# EAGLE board Main Board - Single-Panel (EAGLE 9.6.2), part 1 of 3
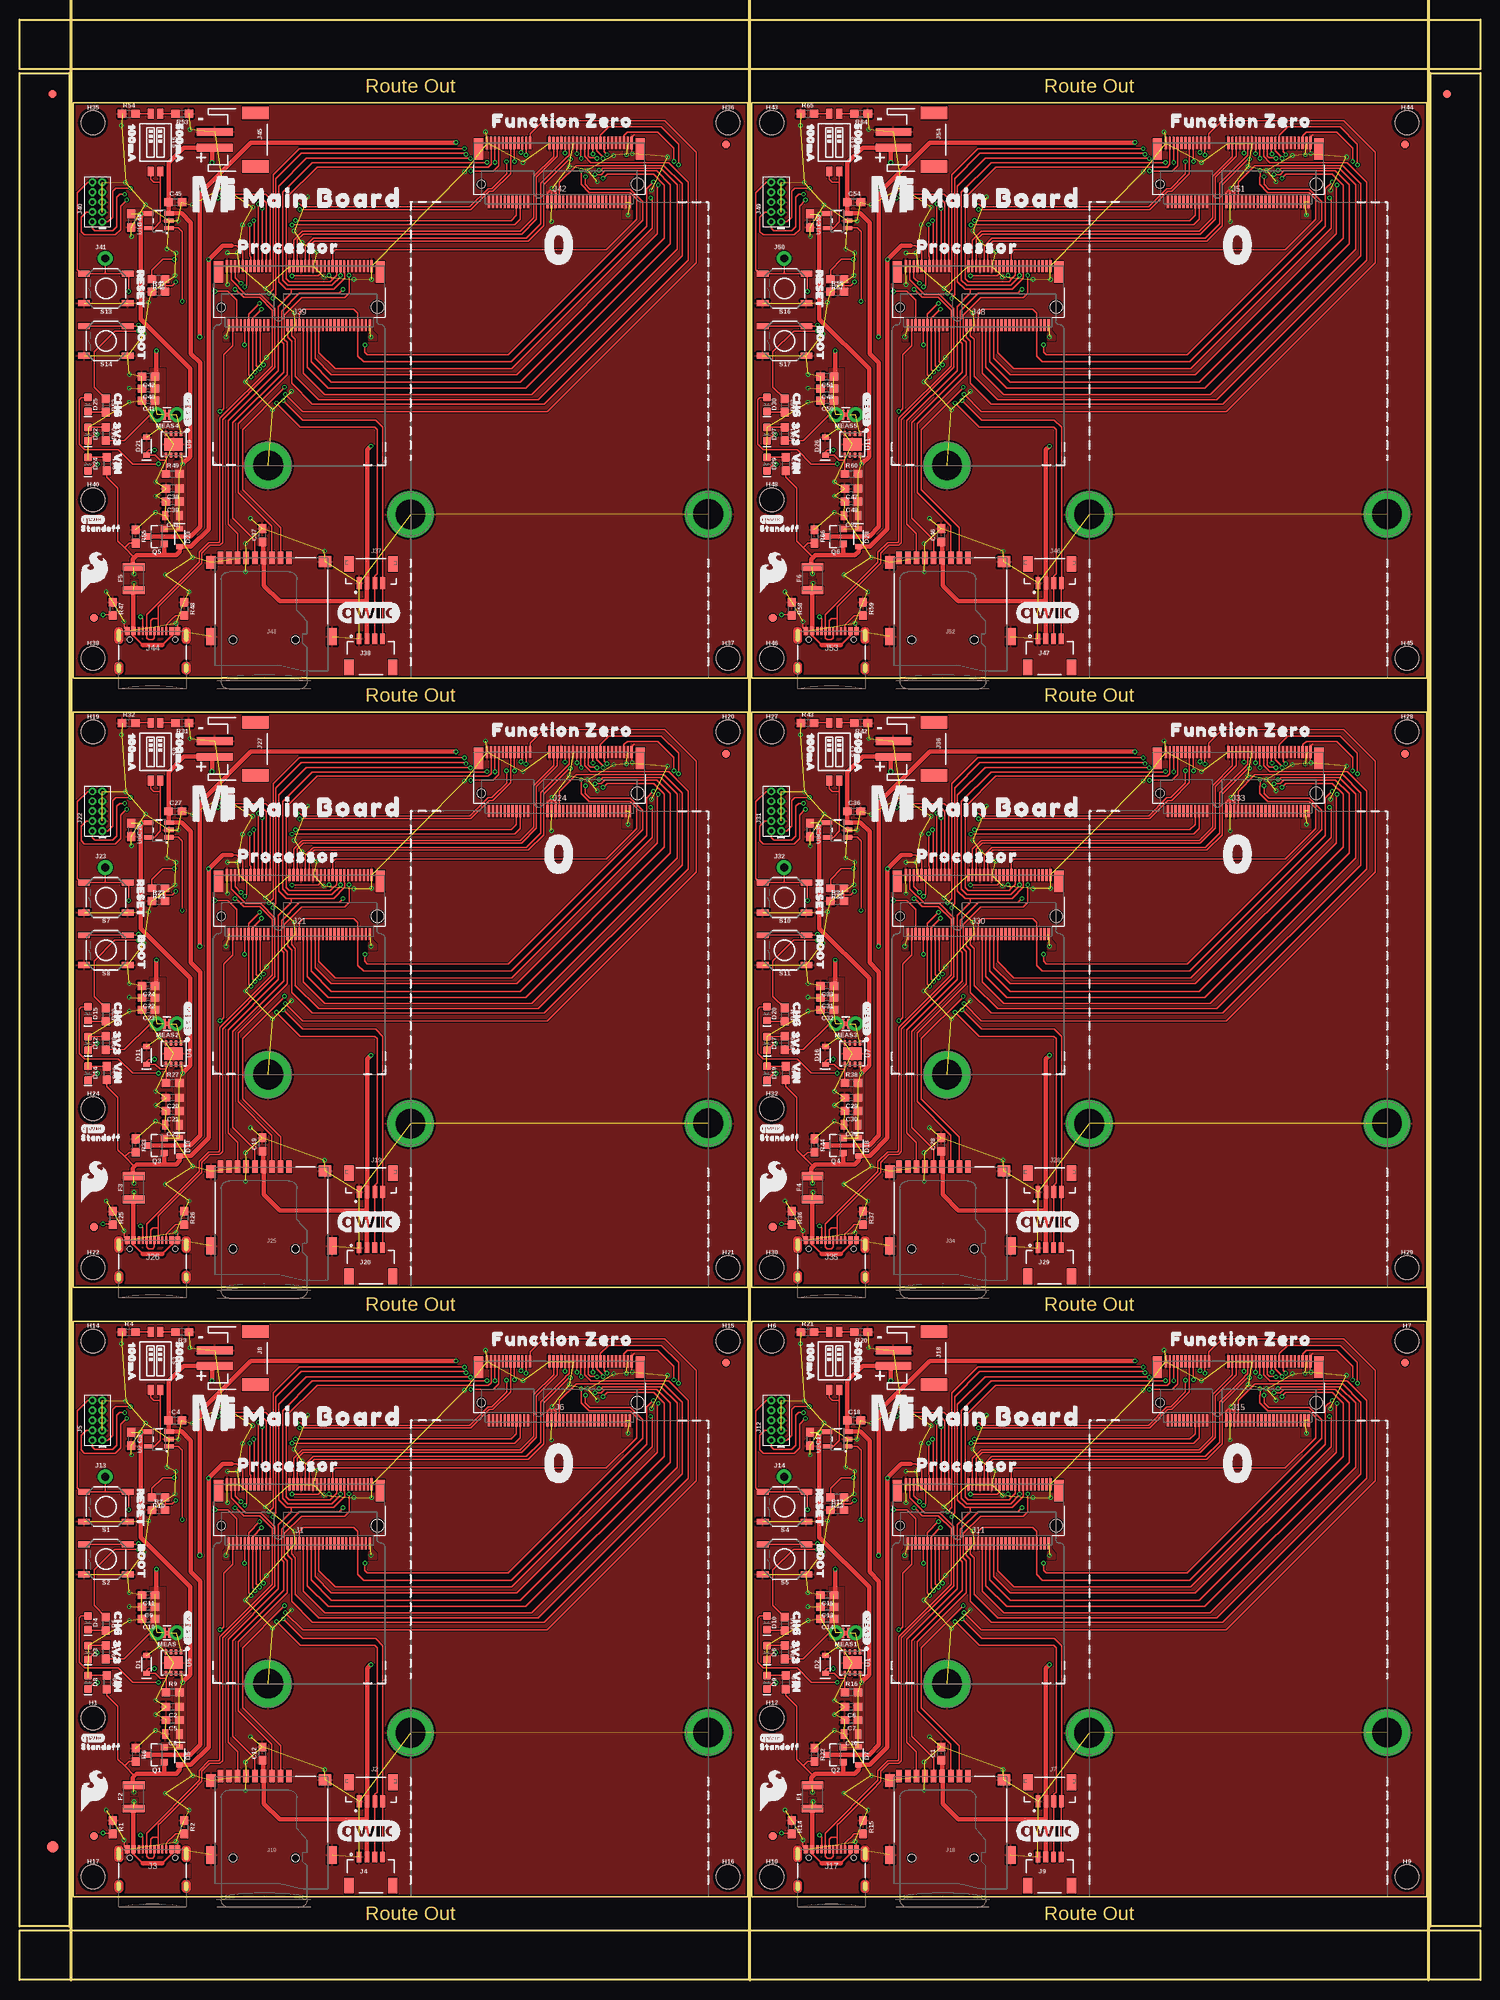
[diagram p0: board, top side]
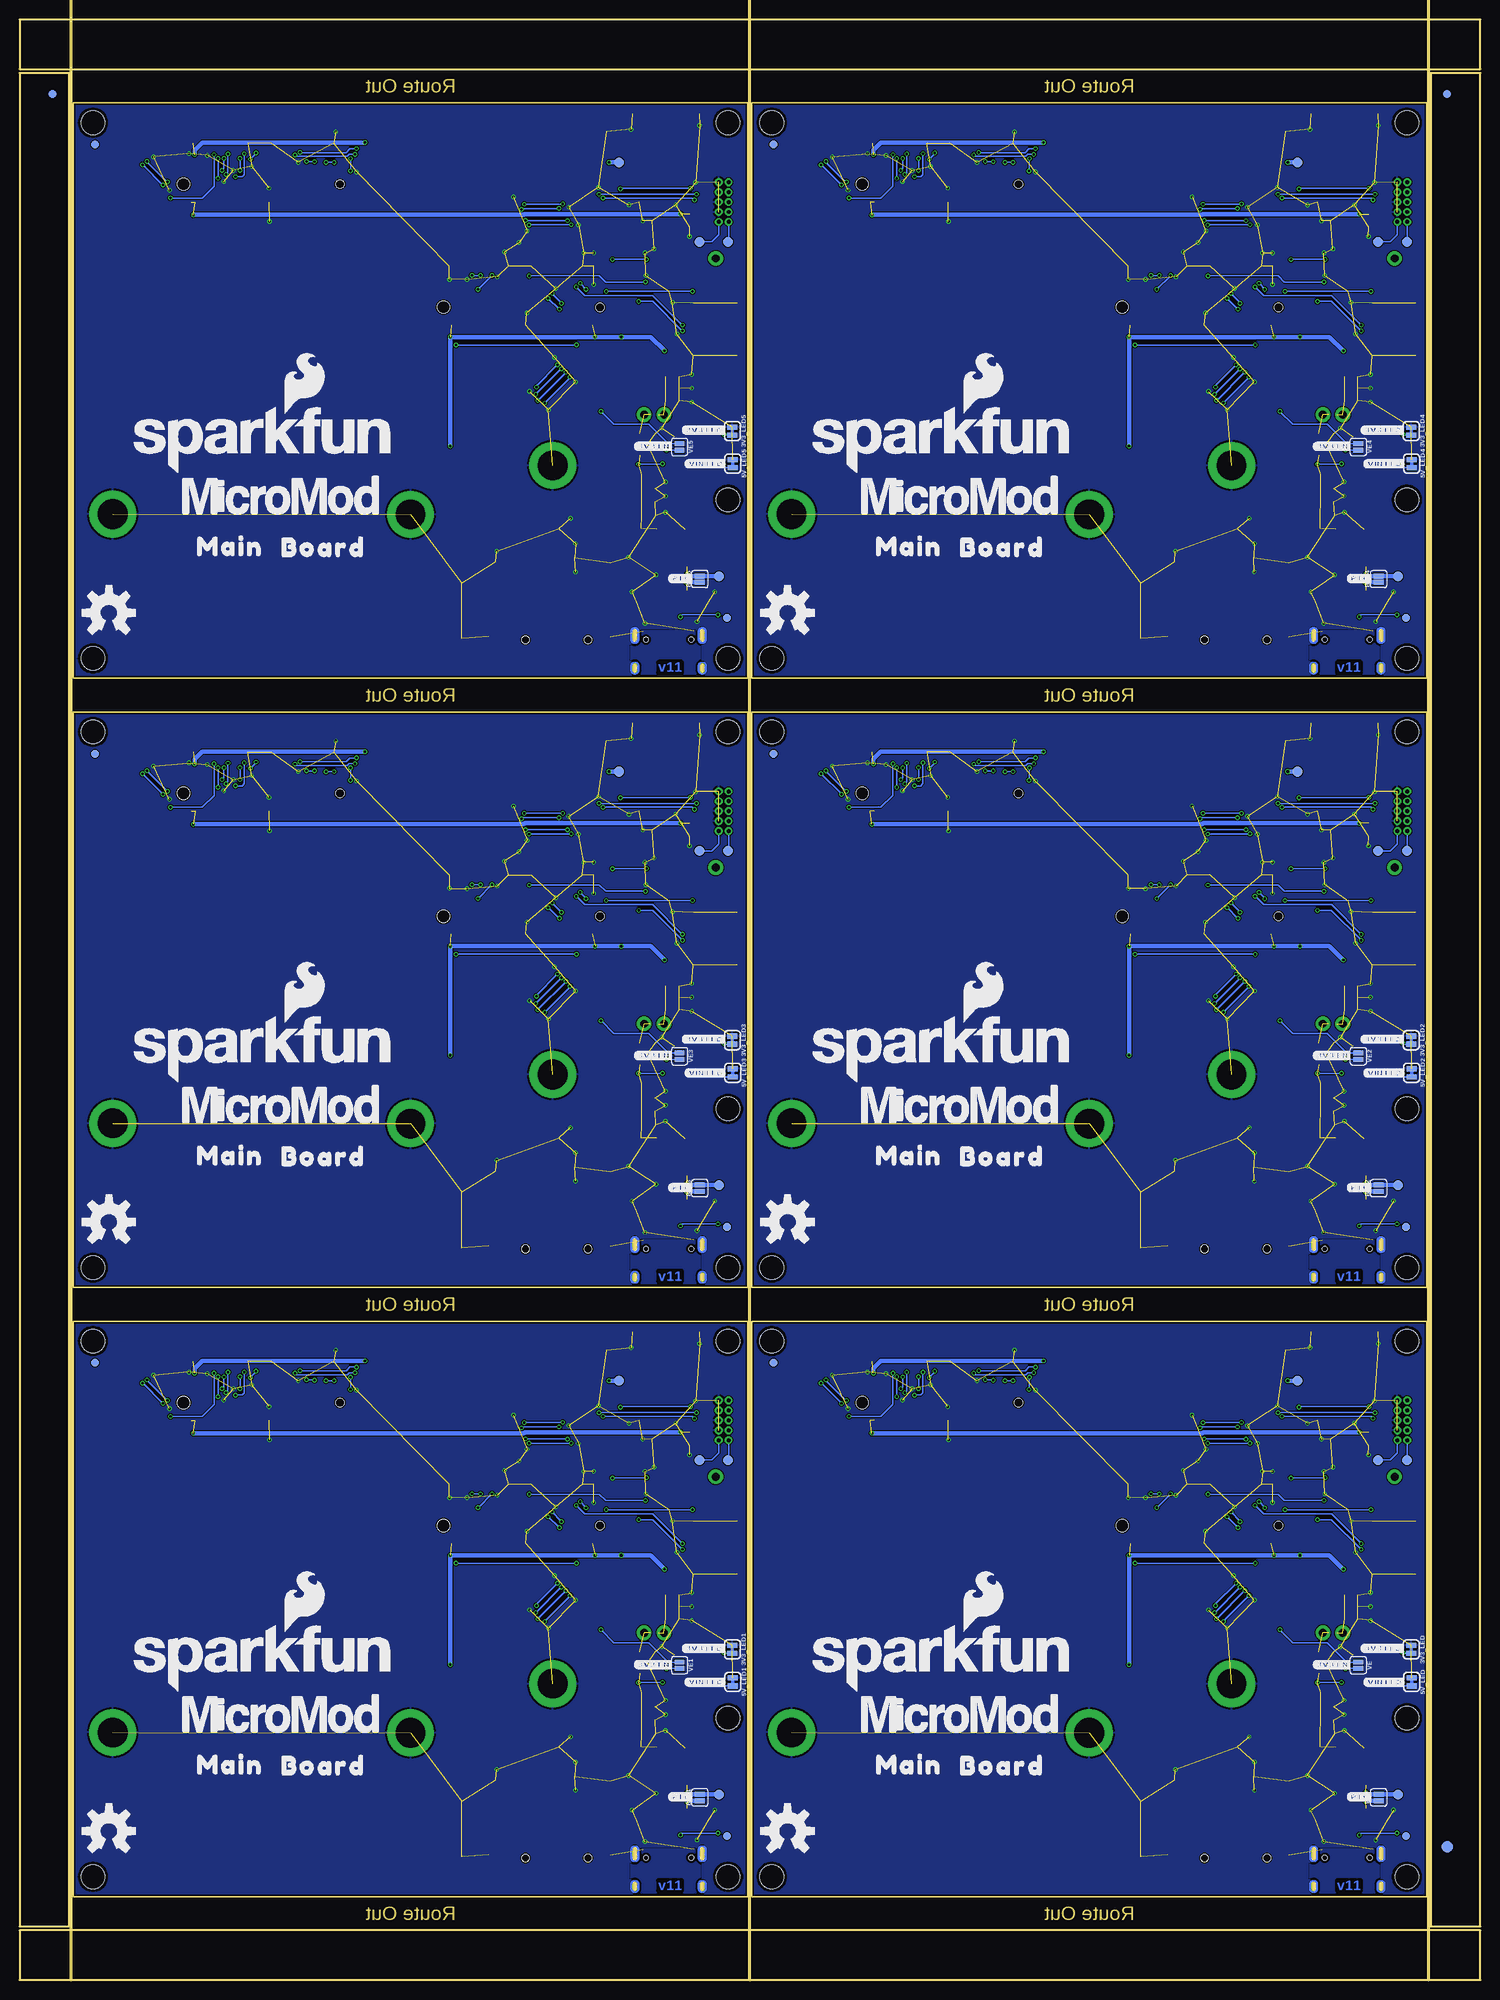
[diagram p1: board, bottom side, seen from below]

Size 186.94 x 250.95 mm. Coordinates in mm from the lower left corner, seen from the top.
Outline: 93.22,10.67 6.86,10.67 6.86,84.33 93.22,84.33 93.22,10.67
Outline: 180.09,10.67 93.73,10.67 93.73,84.33 180.09,84.33 180.09,10.67
Outline: 93.22,88.65 6.86,88.65 6.86,162.31 93.22,162.31 93.22,88.65
Outline: 180.09,88.65 93.73,88.65 93.73,162.31 180.09,162.31 180.09,88.65
Outline: 93.22,166.62 6.86,166.62 6.86,240.28 93.22,240.28 93.22,166.62
Outline: 180.09,166.62 93.73,166.62 93.73,240.28 180.09,240.28 180.09,166.62
Outline: 0,6.35 186.94,6.35 186.94,0 0,0 0,6.35
Outline: 180.59,244.09 186.94,244.09 186.94,6.86 180.59,6.86 180.59,244.09
Outline: 0,250.95 186.94,250.95 186.94,244.6 0,244.6 0,250.95
Outline: 0,244.09 6.35,244.09 6.35,6.86 0,6.86 0,244.09
Copper layers (1*16): Top 0.035mm / dielectric 1.5mm / Bottom 0.035mm
Design rules "Main Board - Single": minimum track width 5mil, minimum drill 0.3mm, track to track 5mil, track to pad 5mil, pad to pad 5mil, via to via 5mil, smd to smd 5mil, copper to edge 7mil, drill to drill 7mil, minimum pad ring 5mil, minimum via ring 5mil, stop-mask expansion 2.5mil, vias tented up to drill 25mil, thermal gap 10mil
Net classes: 0 default: width 0.178 mm, drill 0.305 mm; 1 POWER: width 0.559 mm, drill 0.305 mm; 2 Diff pairs: width 0.203 mm, drill 0.305 mm
tRestrict: area 67.8,71.4 to 67.9,71.9; area 68.3,71.4 to 68.4,71.9; area 154.6,71.4 to 154.8,71.9; area 155.1,71.4 to 155.3,71.9; area 67.8,149.4 to 67.9,149.9; area 68.3,149.4 to 68.4,149.9; area 154.6,149.4 to 154.8,149.9; area 155.1,149.4 to 155.3,149.9; area 67.8,227.3 to 67.9,227.8; area 68.3,227.3 to 68.4,227.8; area 154.6,227.3 to 154.8,227.8; area 155.1,227.3 to 155.3,227.8
Milling: 3 lines

## Footprints (pad centres in the part's own frame; a part is rotated, then mirrored left to right if it is on the bottom)
SMT-JUMPER_2_NC_TRACE_SILK = smd 0.66 x 1.27: 1 -0.521,0; 2 0.521,0
SMT-JUMPER_2_NO_SILK = smd 0.635 x 1.27: 1 -0.406,0; 2 0.406,0
0603 = smd 1.1 x 1: 1 -0.85,0; 2 0.85,0
0805 = smd 0.8 x 1.2: 1 -0.9,0; 2 0.9,0
SOD-323 = smd 0.63 x 0.83: A 1.15,0; C -1.15,0
LED-0603 = smd 1 x 1: A -0.877,0; C 0.877,0
FIDUCIAL-1X2 = smd 1 x 1: 1 0,0
FIDUCIAL-1.5X3 = smd 1.5 x 1.5: 1 0,0
1210 = smd 1 x 2.8: 1 -1.5,0; 2 1.5,0
STAND-OFF-TIGHT = hole 3.048: 0,0
STAND-OFF-REFLOW-M2.5 = drill 3.8 pad 6: 1 0,0
M.2-CONNECTOR-E = smd 0.3 x 1.55: 1 9.25,-5.275; 2 9,2.275; 3 8.75,-5.275; 4 8.5,2.275; 5 8.25,-5.275; 6 8,2.275; 7 7.75,-5.275; 8 7.5,2.275; 9 7.25,-5.275; 10 7,2.275; 11 6.75,-5.275; 12 6.5,2.275; 13 6.25,-5.275; 14 6,2.275; 15 5.75,-5.275; 16 5.5,2.275; 17 5.25,-5.275; 18 5,2.275; 19 4.75,-5.275; 20 4.5,2.275; 21 4.25,-5.275; 22 4,2.275; 23 3.75,-5.275; 32 1.5,2.275; 33 1.25,-5.275; 34 1,2.275; 35 0.75,-5.275; 36 0.5,2.275; 37 0.25,-5.275; 38 0,2.275; 39 -0.25,-5.275; 40 -0.5,2.275; 41 -0.75,-5.275; 42 -1,2.275; 43 -1.25,-5.275; 44 -1.5,2.275; 45 -1.75,-5.275; 46 -2,2.275; 47 -2.25,-5.275; 48 -2.5,2.275; 49 -2.75,-5.275; 50 -3,2.275; 51 -3.25,-5.275; 52 -3.5,2.275; 53 -3.75,-5.275; 54 -4,2.275; 55 -4.25,-5.275; 56 -4.5,2.275; 57 -4.75,-5.275; 58 -5,2.275; 59 -5.25,-5.275; 60 -5.5,2.275; 61 -5.75,-5.275; 62 -6,2.275; 63 -6.25,-5.275; 64 -6.5,2.275; 65 -6.75,-5.275; 66 -7,2.275; 67 -7.25,-5.275; 68 -7.5,2.275; 69 -7.75,-5.275; 70 -8,2.275; 71 -8.25,-5.275; 72 -8.5,2.275; 73 -8.75,-5.275; 74 -9,2.275; 75 -9.25,-5.275 | smd 1.2 x 2.75: A1 10.35,-4.5; A2 -10.35,-4.5 | hole 1.1: 10,0 | hole 1.6: -10,0
JST04_1MM_VERT = smd 0.6 x 1.55: 1 -1.478,0.775; 2 -0.478,0.775; 3 0.522,0.775; 4 1.522,0.775 | smd 1.2 x 2: NC1 -2.778,3.2; NC2 2.822,3.2
USB-C-16P-2LAYER-PADS = smd 0.3 x 1: A5 -1.25,-0.34; A6 -0.25,-0.34; A7 0.25,-0.34; A8 1.25,-0.34; B5 1.75,-0.34; B6 0.75,-0.34; B7 -0.75,-0.34; B8 -1.75,-0.34 | smd 0.6 x 1: GND -3.225,-0.34; GND2 3.225,-0.34; VBUS1 -2.45,-0.34; VBUS2 2.45,-0.34 | drill 0.4 pad 0.6 long: SHLD1 -4.318,-0.915; SHLD2 4.318,-0.915; SHLD3 -4.318,-5.095; SHLD4 4.318,-5.095 | hole 0.65: -2.89,-1.445; 2.89,-1.445
JST04_1MM_RA = smd 0.6 x 1.35: 1 -1.5,0; 2 -0.5,0; 3 0.5,0; 4 1.5,0 | smd 1.2 x 2: NC1 2.8,-3.675; NC2 -2.8,-3.675
2X5-PTH-1.27MM = drill 0.508 pad 1: 1 -2.54,-0.635; 2 -2.54,0.635; 3 -1.27,-0.635; 4 -1.27,0.635; 5 0,-0.635; 6 0,0.635; 7 1.27,-0.635; 8 1.27,0.635; 9 2.54,-0.635; 10 2.54,0.635
M.2-CONNECTOR-E-FUNCTION-STANDARD = smd 0.3 x 1.55: 1 9.25,-5.275; 2 9,2.275; 3 8.75,-5.275; 4 8.5,2.275; 5 8.25,-5.275; 6 8,2.275; 7 7.75,-5.275; 8 7.5,2.275; 9 7.25,-5.275; 10 7,2.275; 11 6.75,-5.275; 12 6.5,2.275; 13 6.25,-5.275; 14 6,2.275; 15 5.75,-5.275; 16 5.5,2.275; 17 5.25,-5.275; 18 5,2.275; 19 4.75,-5.275; 20 4.5,2.275; 21 4.25,-5.275; 22 4,2.275; 23 3.75,-5.275; 32 1.5,2.275; 33 1.25,-5.275; 34 1,2.275; 35 0.75,-5.275; 36 0.5,2.275; 37 0.25,-5.275; 38 0,2.275; 39 -0.25,-5.275; 40 -0.5,2.275; 41 -0.75,-5.275; 42 -1,2.275; 43 -1.25,-5.275; 44 -1.5,2.275; 45 -1.75,-5.275; 46 -2,2.275; 47 -2.25,-5.275; 48 -2.5,2.275; 49 -2.75,-5.275; 50 -3,2.275; 51 -3.25,-5.275; 52 -3.5,2.275; 53 -3.75,-5.275; 54 -4,2.275; 55 -4.25,-5.275; 56 -4.5,2.275; 57 -4.75,-5.275; 58 -5,2.275; 59 -5.25,-5.275; 60 -5.5,2.275; 61 -5.75,-5.275; 62 -6,2.275; 63 -6.25,-5.275; 64 -6.5,2.275; 65 -6.75,-5.275; 66 -7,2.275; 67 -7.25,-5.275; 68 -7.5,2.275; 69 -7.75,-5.275; 70 -8,2.275; 71 -8.25,-5.275; 72 -8.5,2.275; 73 -8.75,-5.275; 74 -9,2.275; 75 -9.25,-5.275 | smd 1.2 x 2.75: A1 10.35,-4.5; A2 -10.35,-4.5 | hole 1.1: 10,0 | hole 1.6: -10,0
JST-2-SMD = smd 1 x 4.6: 1 -1,-3.7; 2 1,-3.7 | smd 1.6 x 3.4: NC1 -3.4,1.5; NC2 3.4,1.5
MICROSD-EXTERNALPIN = smd 0.7 x 1.6: 1 2.25,10.5; 2 1.15,10.5; 3 0.05,10.5; 4 -1.05,10.5; 5 -2.15,10.5; 6 -3.25,10.5; 7 -4.35,10.5; 8 -5.45,10.5; 9 -6.55,10.5 | smd 1.2 x 1.6: 10 -7.75,9.9 | smd 1.2 x 2.2: 11 -7.75,0.4; 12 7.75,0.4 | smd 1.6 x 1.4: 13 6.85,10 | hole 1: 3.05,0; -4.95,0
1X01_NO_SILK = drill 1.016 pad 1.88: 1 0,0
COMBO-JUMPER_2_NC_TRACE = smd 0.635 x 1.27: 1 -0.508,0; 2 0.508,0 | drill 1.016 pad 1.88: 3 -1.27,0; 4 1.27,0
SOT23-3 = smd 0.8 x 0.9: 1 -0.95,-1; 2 0.95,-1; 3 0,1.1
TACTILE_SWITCH_SMD_5.2MM = smd 1.524 x 0.762: 1 -2.794,1.905; 2 2.794,1.905; 3 -2.794,-1.905; 4 2.794,-1.905
DIPSWITCH-02-50MIL = smd 0.762 x 1.27: 1 -0.635,-3.7; 2 0.635,-3.7; 3 0.635,3.7; 4 -0.635,3.7
PAD.03X.05 = smd 1.27 x 1.27: 1 0,0
UDFN-8 = smd 0.3 x 0.65: 1 -0.975,-1.375; 2 -0.325,-1.375; 3 0.325,-1.375; 4 0.975,-1.375; 5 0.975,1.375; 6 0.325,1.375; 7 -0.325,1.375; 8 -0.975,1.375 | smd 2.35 x 1.6: EP 0,0
SOT23-5 = smd 0.55 x 1.2: 1 -0.95,-1.3; 2 0,-1.3; 3 0.95,-1.3; 4 0.95,1.3; 5 -0.95,1.3

## Placement (x,y rotation side)
3V3_LED  [SMT-JUMPER_2_NC_TRACE_SILK]  8.84,42.32 270 bottom
3V3_LED1  [SMT-JUMPER_2_NC_TRACE_SILK]  95.71,42.32 270 bottom
3V3_LED2  [SMT-JUMPER_2_NC_TRACE_SILK]  8.84,120.29 270 bottom
3V3_LED3  [SMT-JUMPER_2_NC_TRACE_SILK]  95.71,120.29 270 bottom
3V3_LED4  [SMT-JUMPER_2_NC_TRACE_SILK]  8.84,198.27 270 bottom
3V3_LED5  [SMT-JUMPER_2_NC_TRACE_SILK]  95.71,198.27 270 bottom
5V_LED  [SMT-JUMPER_2_NC_TRACE_SILK]  8.79,38.15 270 bottom
5V_LED1  [SMT-JUMPER_2_NC_TRACE_SILK]  95.66,38.15 270 bottom
5V_LED2  [SMT-JUMPER_2_NC_TRACE_SILK]  8.79,116.13 270 bottom
5V_LED3  [SMT-JUMPER_2_NC_TRACE_SILK]  95.66,116.13 270 bottom
5V_LED4  [SMT-JUMPER_2_NC_TRACE_SILK]  8.79,194.11 270 bottom
5V_LED5  [SMT-JUMPER_2_NC_TRACE_SILK]  95.66,194.11 270 bottom
BYP  JUMPER-SMT_2_NO_SILK  [SMT-JUMPER_2_NO_SILK]  13,23.37 90 bottom
BYP1  JUMPER-SMT_2_NO_SILK  [SMT-JUMPER_2_NO_SILK]  99.87,23.37 90 bottom
BYP2  JUMPER-SMT_2_NO_SILK  [SMT-JUMPER_2_NO_SILK]  13,101.35 90 bottom
BYP3  JUMPER-SMT_2_NO_SILK  [SMT-JUMPER_2_NO_SILK]  99.87,101.35 90 bottom
BYP4  JUMPER-SMT_2_NO_SILK  [SMT-JUMPER_2_NO_SILK]  13,179.32 90 bottom
BYP5  JUMPER-SMT_2_NO_SILK  [SMT-JUMPER_2_NO_SILK]  99.87,179.32 90 bottom
C1  0.1uF  [0603]  117.96,28.98 90 top
C2  0.22uF  [0603]  19.6,34.95 180 top
C3  4.7uF  [0603]  14.3,69.24 270 top
C4  4.7uF  [0603]  19.94,71.63 0 top
C5  0.1uF  [0603]  19.6,33.27 180 top
C6  0.22uF  [0603]  106.46,34.95 180 top
C7  0.1uF  [0603]  106.46,33.27 180 top
C8  10uF  [0805]  19.56,31.5 180 top
C9  1.0uF  [0603]  16.51,47.75 180 top
C10  0.1uF  [0603]  16.51,46.23 180 top
C11  0.22uF  [0603]  16.51,49.28 180 top
C12  0.1uF  [0603]  31.09,28.98 90 top
C13  1.0uF  [0603]  103.38,47.75 180 top
C14  0.1uF  [0603]  103.38,46.23 180 top
C15  0.22uF  [0603]  103.38,49.28 180 top
C16  10uF  [0805]  106.43,31.5 180 top
C17  4.7uF  [0603]  101.17,69.24 270 top
C18  4.7uF  [0603]  106.81,71.63 0 top
C19  0.1uF  [0603]  31.09,106.96 90 top
C20  0.22uF  [0603]  19.6,112.93 180 top
C21  0.1uF  [0603]  19.6,111.25 180 top
C22  1.0uF  [0603]  16.51,125.73 180 top
C23  0.1uF  [0603]  16.51,124.21 180 top
C24  0.22uF  [0603]  16.51,127.25 180 top
C25  10uF  [0805]  19.56,109.47 180 top
C26  4.7uF  [0603]  14.3,147.22 270 top
C27  4.7uF  [0603]  19.94,149.61 0 top
C28  0.1uF  [0603]  117.96,106.96 90 top
C29  0.22uF  [0603]  106.46,112.93 180 top
C30  0.1uF  [0603]  106.46,111.25 180 top
C31  1.0uF  [0603]  103.38,125.73 180 top
C32  0.1uF  [0603]  103.38,124.21 180 top
C33  0.22uF  [0603]  103.38,127.25 180 top
C34  10uF  [0805]  106.43,109.47 180 top
C35  4.7uF  [0603]  101.17,147.22 270 top
C36  4.7uF  [0603]  106.81,149.61 0 top
C37  0.1uF  [0603]  31.09,184.94 90 top
C38  0.22uF  [0603]  19.6,190.91 180 top
C39  0.1uF  [0603]  19.6,189.23 180 top
C40  1.0uF  [0603]  16.51,203.71 180 top
C41  0.1uF  [0603]  16.51,202.18 180 top
C42  0.22uF  [0603]  16.51,205.23 180 top
C43  10uF  [0805]  19.56,187.45 180 top
C44  4.7uF  [0603]  14.3,225.2 270 top
C45  4.7uF  [0603]  19.94,227.58 0 top
C46  0.1uF  [0603]  117.96,184.94 90 top
C47  0.22uF  [0603]  106.46,190.91 180 top
C48  0.1uF  [0603]  106.46,189.23 180 top
C49  1.0uF  [0603]  103.38,203.71 180 top
C50  0.1uF  [0603]  103.38,202.18 180 top
C51  0.22uF  [0603]  103.38,205.23 180 top
C52  10uF  [0805]  106.43,187.45 180 top
C53  4.7uF  [0603]  101.17,225.2 270 top
C54  4.7uF  [0603]  106.81,227.58 0 top
D1  3.3V  [SOD-323]  16.26,40.39 90 top
D2  3.3V  [SOD-323]  103.12,40.39 90 top
D3  RED  [LED-0603]  8.76,41.91 270 top
D4  Yellow  [LED-0603]  8.76,45.72 270 top
D5  3A/10V/280mV  [SOD-323]  20.5,28.68 270 top
D6  RED  [LED-0603]  95.63,41.91 270 top
D7  3A/10V/280mV  [SOD-323]  107.37,28.68 270 top
D8  RED  [LED-0603]  8.76,38.1 270 top
D9  RED  [LED-0603]  95.63,38.1 270 top
D10  Yellow  [LED-0603]  95.63,45.72 270 top
D11  3.3V  [SOD-323]  16.26,118.36 90 top
D12  RED  [LED-0603]  8.76,119.89 270 top
D13  3A/10V/280mV  [SOD-323]  20.5,106.65 270 top
D14  RED  [LED-0603]  8.76,116.08 270 top
D15  Yellow  [LED-0603]  8.76,123.7 270 top
D16  3.3V  [SOD-323]  103.12,118.36 90 top
D17  RED  [LED-0603]  95.63,119.89 270 top
D18  3A/10V/280mV  [SOD-323]  107.37,106.65 270 top
D19  RED  [LED-0603]  95.63,116.08 270 top
D20  Yellow  [LED-0603]  95.63,123.7 270 top
D21  3.3V  [SOD-323]  16.26,196.34 90 top
D22  RED  [LED-0603]  8.76,197.87 270 top
D23  3A/10V/280mV  [SOD-323]  20.5,184.63 270 top
D24  RED  [LED-0603]  8.76,194.06 270 top
D25  Yellow  [LED-0603]  8.76,201.68 270 top
D26  3.3V  [SOD-323]  103.12,196.34 90 top
D27  RED  [LED-0603]  95.63,197.87 270 top
D28  3A/10V/280mV  [SOD-323]  107.37,184.63 270 top
D29  RED  [LED-0603]  95.63,194.06 270 top
D30  Yellow  [LED-0603]  95.63,201.68 270 top
E$1  [FIDUCIAL-1X2]  4.23,241.43 0 top
E$2  [FIDUCIAL-1X2]  4.23,241.43 0 bottom
E$3  [FIDUCIAL-1X2]  182.71,241.43 0 top
E$4  [FIDUCIAL-1X2]  182.71,241.43 0 bottom
E$5  [FIDUCIAL-1.5X3]  4.23,17.02 0 top
E$6  [FIDUCIAL-1.5X3]  4.23,17.02 0 bottom
F1  6V/2A  [1210]  101.47,23.44 90 top
F2  6V/2A  [1210]  14.61,23.44 90 top
F3  6V/2A  [1210]  14.61,101.42 90 top
F4  6V/2A  [1210]  101.47,101.42 90 top
F5  6V/2A  [1210]  14.61,179.4 90 top
F6  6V/2A  [1210]  101.47,179.4 90 top
FD1  FIDUCIAL1X2  [FIDUCIAL-1X2]  90.42,78.99 0 bottom
FD2  FIDUCIAL1X2  [FIDUCIAL-1X2]  90.42,78.99 0 top
FD3  FIDUCIAL1X2  [FIDUCIAL-1X2]  9.52,18.41 90 top
FD4  FIDUCIAL1X2  [FIDUCIAL-1X2]  9.52,18.41 270 bottom
FD5  FIDUCIAL1X2  [FIDUCIAL-1X2]  177.29,78.99 0 bottom
FD6  FIDUCIAL1X2  [FIDUCIAL-1X2]  177.29,78.99 0 top
FD7  FIDUCIAL1X2  [FIDUCIAL-1X2]  96.39,18.41 90 top
FD8  FIDUCIAL1X2  [FIDUCIAL-1X2]  96.39,18.41 270 bottom
FD9  FIDUCIAL1X2  [FIDUCIAL-1X2]  90.42,156.97 0 bottom
FD10  FIDUCIAL1X2  [FIDUCIAL-1X2]  90.42,156.97 0 top
FD11  FIDUCIAL1X2  [FIDUCIAL-1X2]  9.52,96.39 90 top
FD12  FIDUCIAL1X2  [FIDUCIAL-1X2]  9.52,96.39 270 bottom
FD13  FIDUCIAL1X2  [FIDUCIAL-1X2]  177.29,156.97 0 bottom
FD14  FIDUCIAL1X2  [FIDUCIAL-1X2]  177.29,156.97 0 top
FD15  FIDUCIAL1X2  [FIDUCIAL-1X2]  96.39,96.39 90 top
FD16  FIDUCIAL1X2  [FIDUCIAL-1X2]  96.39,96.39 270 bottom
FD17  FIDUCIAL1X2  [FIDUCIAL-1X2]  90.42,234.95 0 bottom
FD18  FIDUCIAL1X2  [FIDUCIAL-1X2]  90.42,234.95 0 top
FD19  FIDUCIAL1X2  [FIDUCIAL-1X2]  9.52,174.37 90 top
FD20  FIDUCIAL1X2  [FIDUCIAL-1X2]  9.52,174.37 270 bottom
FD21  FIDUCIAL1X2  [FIDUCIAL-1X2]  177.29,234.95 0 bottom
FD22  FIDUCIAL1X2  [FIDUCIAL-1X2]  177.29,234.95 0 top
FD23  FIDUCIAL1X2  [FIDUCIAL-1X2]  96.39,174.37 90 top
FD24  FIDUCIAL1X2  [FIDUCIAL-1X2]  96.39,174.37 270 bottom
H1  STAND-OFFTIGHT  [STAND-OFF-TIGHT]  9.4,33.53 0 top
H2  STAND-OFF-REFLOW-M2.5_2.5MM_TALL  [STAND-OFF-REFLOW-M2.5]  175.01,31.67 270 top
H3  STAND-OFF-REFLOW-M2.5_2.5MM_TALL  [STAND-OFF-REFLOW-M2.5]  88.14,31.67 270 top
H4  STAND-OFF-REFLOW-M2.5_2.5MM_TALL  [STAND-OFF-REFLOW-M2.5]  50.04,31.65 270 top
H5  STAND-OFF-REFLOW-M2.5_2.5MM_TALL  [STAND-OFF-REFLOW-M2.5]  118.69,37.92 270 top
H6  STAND-OFFTIGHT  [STAND-OFF-TIGHT]  96.27,81.79 0 top
H7  STAND-OFFTIGHT  [STAND-OFF-TIGHT]  177.55,81.79 0 top
H8  STAND-OFF-REFLOW-M2.5_2.5MM_TALL  [STAND-OFF-REFLOW-M2.5]  31.83,37.92 270 top
H9  STAND-OFFTIGHT  [STAND-OFF-TIGHT]  177.55,13.21 0 top
H10  STAND-OFFTIGHT  [STAND-OFF-TIGHT]  96.27,13.21 0 top
H11  STAND-OFF-REFLOW-M2.5_2.5MM_TALL  [STAND-OFF-REFLOW-M2.5]  136.91,31.65 270 top
H12  STAND-OFFTIGHT  [STAND-OFF-TIGHT]  96.27,33.53 0 top
H13  STAND-OFF-REFLOW-M2.5_2.5MM_TALL  [STAND-OFF-REFLOW-M2.5]  88.14,109.65 270 top
H14  STAND-OFFTIGHT  [STAND-OFF-TIGHT]  9.4,81.79 0 top
H15  STAND-OFFTIGHT  [STAND-OFF-TIGHT]  90.68,81.79 0 top
H16  STAND-OFFTIGHT  [STAND-OFF-TIGHT]  90.68,13.21 0 top
H17  STAND-OFFTIGHT  [STAND-OFF-TIGHT]  9.4,13.21 0 top
H18  STAND-OFF-REFLOW-M2.5_2.5MM_TALL  [STAND-OFF-REFLOW-M2.5]  31.83,115.9 270 top
H19  STAND-OFFTIGHT  [STAND-OFF-TIGHT]  9.4,159.77 0 top
H20  STAND-OFFTIGHT  [STAND-OFF-TIGHT]  90.68,159.77 0 top
H21  STAND-OFFTIGHT  [STAND-OFF-TIGHT]  90.68,91.19 0 top
H22  STAND-OFFTIGHT  [STAND-OFF-TIGHT]  9.4,91.19 0 top
H23  STAND-OFF-REFLOW-M2.5_2.5MM_TALL  [STAND-OFF-REFLOW-M2.5]  50.04,109.63 270 top
H24  STAND-OFFTIGHT  [STAND-OFF-TIGHT]  9.4,111.51 0 top
H25  STAND-OFF-REFLOW-M2.5_2.5MM_TALL  [STAND-OFF-REFLOW-M2.5]  175.01,109.65 270 top
H26  STAND-OFF-REFLOW-M2.5_2.5MM_TALL  [STAND-OFF-REFLOW-M2.5]  118.69,115.9 270 top
H27  STAND-OFFTIGHT  [STAND-OFF-TIGHT]  96.27,159.77 0 top
H28  STAND-OFFTIGHT  [STAND-OFF-TIGHT]  177.55,159.77 0 top
H29  STAND-OFFTIGHT  [STAND-OFF-TIGHT]  177.55,91.19 0 top
H30  STAND-OFFTIGHT  [STAND-OFF-TIGHT]  96.27,91.19 0 top
H31  STAND-OFF-REFLOW-M2.5_2.5MM_TALL  [STAND-OFF-REFLOW-M2.5]  136.91,109.63 270 top
H32  STAND-OFFTIGHT  [STAND-OFF-TIGHT]  96.27,111.51 0 top
H33  STAND-OFF-REFLOW-M2.5_2.5MM_TALL  [STAND-OFF-REFLOW-M2.5]  88.14,187.63 270 top
H34  STAND-OFF-REFLOW-M2.5_2.5MM_TALL  [STAND-OFF-REFLOW-M2.5]  31.83,193.88 270 top
H35  STAND-OFFTIGHT  [STAND-OFF-TIGHT]  9.4,237.74 0 top
H36  STAND-OFFTIGHT  [STAND-OFF-TIGHT]  90.68,237.74 0 top
H37  STAND-OFFTIGHT  [STAND-OFF-TIGHT]  90.68,169.16 0 top
H38  STAND-OFFTIGHT  [STAND-OFF-TIGHT]  9.4,169.16 0 top
H39  STAND-OFF-REFLOW-M2.5_2.5MM_TALL  [STAND-OFF-REFLOW-M2.5]  50.04,187.6 270 top
H40  STAND-OFFTIGHT  [STAND-OFF-TIGHT]  9.4,189.48 0 top
H41  STAND-OFF-REFLOW-M2.5_2.5MM_TALL  [STAND-OFF-REFLOW-M2.5]  175.01,187.63 270 top
H42  STAND-OFF-REFLOW-M2.5_2.5MM_TALL  [STAND-OFF-REFLOW-M2.5]  118.69,193.88 270 top
H43  STAND-OFFTIGHT  [STAND-OFF-TIGHT]  96.27,237.74 0 top
H44  STAND-OFFTIGHT  [STAND-OFF-TIGHT]  177.55,237.74 0 top
H45  STAND-OFFTIGHT  [STAND-OFF-TIGHT]  177.55,169.16 0 top
H46  STAND-OFFTIGHT  [STAND-OFF-TIGHT]  96.27,169.16 0 top
H47  STAND-OFF-REFLOW-M2.5_2.5MM_TALL  [STAND-OFF-REFLOW-M2.5]  136.91,187.6 270 top
H48  STAND-OFFTIGHT  [STAND-OFF-TIGHT]  96.27,189.48 0 top
J1  MICROMOD-2222-C  [M.2-CONNECTOR-E]  35.81,58.17 180 top
J2  Vertical Qwiic Connector  [JST04_1MM_VERT]  44.96,22.1 0 top
J3  [USB-C-16P-2LAYER-PADS]  17.02,17.07 0 top
J4  QWIIC_RIGHT_ANGLE  [JST04_1MM_RA]  44.96,15.75 0 top
J5  CORTEX_JTAG_DEBUG_MINIMUM_PTH  [2X5-PTH-1.27MM]  9.97,71.63 90 top
J6  MICROMOD_CARRIER  [M.2-CONNECTOR-E-FUNCTION-STANDARD]  69.09,73.91 180 top
J7  Vertical Qwiic Connector  [JST04_1MM_VERT]  131.83,22.1 0 top
J8  [JST-2-SMD]  28.68,79.6 270 top
J9  QWIIC_RIGHT_ANGLE  [JST04_1MM_RA]  131.83,15.75 0 top
J10  MICRO-SD-PUSH-PUSH-EXT-PIN  [MICROSD-EXTERNALPIN]  32.26,15.6 0 top
J11  MICROMOD-2222-C  [M.2-CONNECTOR-E]  122.68,58.17 180 top
J12  CORTEX_JTAG_DEBUG_MINIMUM_PTH  [2X5-PTH-1.27MM]  96.84,71.63 90 top
J13  [1X01_NO_SILK]  10.97,64.41 0 top
J14  [1X01_NO_SILK]  97.84,64.41 0 top
J15  MICROMOD_CARRIER  [M.2-CONNECTOR-E-FUNCTION-STANDARD]  155.96,73.91 180 top
J16  MICRO-SD-PUSH-PUSH-EXT-PIN  [MICROSD-EXTERNALPIN]  119.13,15.6 0 top
J17  [USB-C-16P-2LAYER-PADS]  103.89,17.07 0 top
J18  [JST-2-SMD]  115.54,79.6 270 top
J19  Vertical Qwiic Connector  [JST04_1MM_VERT]  44.96,100.08 0 top
J20  QWIIC_RIGHT_ANGLE  [JST04_1MM_RA]  44.96,93.73 0 top
J21  MICROMOD-2222-C  [M.2-CONNECTOR-E]  35.81,136.14 180 top
J22  CORTEX_JTAG_DEBUG_MINIMUM_PTH  [2X5-PTH-1.27MM]  9.97,149.61 90 top
J23  [1X01_NO_SILK]  10.97,142.39 0 top
J24  MICROMOD_CARRIER  [M.2-CONNECTOR-E-FUNCTION-STANDARD]  69.09,151.89 180 top
J25  MICRO-SD-PUSH-PUSH-EXT-PIN  [MICROSD-EXTERNALPIN]  32.26,93.57 0 top
J26  [USB-C-16P-2LAYER-PADS]  17.02,95.05 0 top
J27  [JST-2-SMD]  28.68,157.58 270 top
J28  Vertical Qwiic Connector  [JST04_1MM_VERT]  131.83,100.08 0 top
J29  QWIIC_RIGHT_ANGLE  [JST04_1MM_RA]  131.83,93.73 0 top
J30  MICROMOD-2222-C  [M.2-CONNECTOR-E]  122.68,136.14 180 top
J31  CORTEX_JTAG_DEBUG_MINIMUM_PTH  [2X5-PTH-1.27MM]  96.84,149.61 90 top
J32  [1X01_NO_SILK]  97.84,142.39 0 top
J33  MICROMOD_CARRIER  [M.2-CONNECTOR-E-FUNCTION-STANDARD]  155.96,151.89 180 top
J34  MICRO-SD-PUSH-PUSH-EXT-PIN  [MICROSD-EXTERNALPIN]  119.13,93.57 0 top
J35  [USB-C-16P-2LAYER-PADS]  103.89,95.05 0 top
J36  [JST-2-SMD]  115.54,157.58 270 top
J37  Vertical Qwiic Connector  [JST04_1MM_VERT]  44.96,178.05 0 top
J38  QWIIC_RIGHT_ANGLE  [JST04_1MM_RA]  44.96,171.7 0 top
J39  MICROMOD-2222-C  [M.2-CONNECTOR-E]  35.81,214.12 180 top
J40  CORTEX_JTAG_DEBUG_MINIMUM_PTH  [2X5-PTH-1.27MM]  9.97,227.59 90 top
J41  [1X01_NO_SILK]  10.97,220.37 0 top
J42  MICROMOD_CARRIER  [M.2-CONNECTOR-E-FUNCTION-STANDARD]  69.09,229.87 180 top
J43  MICRO-SD-PUSH-PUSH-EXT-PIN  [MICROSD-EXTERNALPIN]  32.26,171.55 0 top
J44  [USB-C-16P-2LAYER-PADS]  17.02,173.02 0 top
J45  [JST-2-SMD]  28.68,235.56 270 top
J46  Vertical Qwiic Connector  [JST04_1MM_VERT]  131.83,178.05 0 top
J47  QWIIC_RIGHT_ANGLE  [JST04_1MM_RA]  131.83,171.7 0 top
J48  MICROMOD-2222-C  [M.2-CONNECTOR-E]  122.68,214.12 180 top
J49  CORTEX_JTAG_DEBUG_MINIMUM_PTH  [2X5-PTH-1.27MM]  96.84,227.59 90 top
J50  [1X01_NO_SILK]  97.84,220.37 0 top
J51  MICROMOD_CARRIER  [M.2-CONNECTOR-E-FUNCTION-STANDARD]  155.96,229.87 180 top
J52  MICRO-SD-PUSH-PUSH-EXT-PIN  [MICROSD-EXTERNALPIN]  119.13,171.55 0 top
J53  [USB-C-16P-2LAYER-PADS]  103.89,173.02 0 top
J54  [JST-2-SMD]  115.54,235.56 270 top
LOGO1  QWIIC_LOGO_8MM  [QWIIC_8MM]  44.7,19.05 0 top
LOGO2  SFE_LOGO_NAME_FLAME.3_INCH  [SFE_LOGO_NAME_FLAME_.3]  69.09,41.15 0 bottom
LOGO3  OSHW-LOGOL  [OSHW-LOGO-L]  88.65,19.05 0 bottom
LOGO4  QWIIC_LOGO_8MM  [QWIIC_8MM]  131.57,19.05 0 top
LOGO5  SFE_LOGO_NAME_FLAME.3_INCH  [SFE_LOGO_NAME_FLAME_.3]  155.96,41.15 0 bottom
LOGO6  OSHW-LOGOL  [OSHW-LOGO-L]  175.51,19.05 0 bottom
LOGO7  QWIIC_LOGO_8MM  [QWIIC_8MM]  44.7,97.03 0 top
LOGO8  SFE_LOGO_NAME_FLAME.3_INCH  [SFE_LOGO_NAME_FLAME_.3]  69.09,119.13 0 bottom
LOGO9  OSHW-LOGOL  [OSHW-LOGO-L]  88.65,97.03 0 bottom
LOGO10  QWIIC_LOGO_8MM  [QWIIC_8MM]  131.57,97.03 0 top
LOGO11  SFE_LOGO_NAME_FLAME.3_INCH  [SFE_LOGO_NAME_FLAME_.3]  155.96,119.13 0 bottom
LOGO12  OSHW-LOGOL  [OSHW-LOGO-L]  175.51,97.03 0 bottom
LOGO13  QWIIC_LOGO_8MM  [QWIIC_8MM]  44.7,175.01 0 top
LOGO14  SFE_LOGO_NAME_FLAME.3_INCH  [SFE_LOGO_NAME_FLAME_.3]  69.09,197.1 0 bottom
LOGO15  OSHW-LOGOL  [OSHW-LOGO-L]  88.65,175.01 0 bottom
LOGO16  QWIIC_LOGO_8MM  [QWIIC_8MM]  131.57,175.01 0 top
LOGO17  SFE_LOGO_NAME_FLAME.3_INCH  [SFE_LOGO_NAME_FLAME_.3]  155.96,197.1 0 bottom
LOGO18  OSHW-LOGOL  [OSHW-LOGO-L]  175.51,175.01 0 bottom
MEAS  JUMPER-COMBO_2_NC_TRACE  [COMBO-JUMPER_2_NC_TRACE]  18.87,44.42 180 top
MEAS1  JUMPER-COMBO_2_NC_TRACE  [COMBO-JUMPER_2_NC_TRACE]  105.74,44.42 180 top
MEAS2  JUMPER-COMBO_2_NC_TRACE  [COMBO-JUMPER_2_NC_TRACE]  18.87,122.4 180 top
MEAS3  JUMPER-COMBO_2_NC_TRACE  [COMBO-JUMPER_2_NC_TRACE]  105.74,122.4 180 top
MEAS4  JUMPER-COMBO_2_NC_TRACE  [COMBO-JUMPER_2_NC_TRACE]  18.87,200.38 180 top
MEAS5  JUMPER-COMBO_2_NC_TRACE  [COMBO-JUMPER_2_NC_TRACE]  105.74,200.38 180 top
Q1  3.1A/30V/105mΩ  [SOT23-3]  17.53,28.83 90 top
Q2  3.1A/30V/105mΩ  [SOT23-3]  104.39,28.83 90 top
Q3  3.1A/30V/105mΩ  [SOT23-3]  17.53,106.81 90 top
Q4  3.1A/30V/105mΩ  [SOT23-3]  104.39,106.81 90 top
Q5  3.1A/30V/105mΩ  [SOT23-3]  17.53,184.78 90 top
Q6  3.1A/30V/105mΩ  [SOT23-3]  104.39,184.78 90 top
R1  5.1k  [0603]  11.94,19.56 270 top
R2  5.1k  [0603]  21.08,19.56 270 top
R3  2.0k  [0603]  20.83,82.93 180 top
R4  10k  [0603]  13.97,82.93 0 top
R5  1k  [0603]  11.05,45.59 270 top
R6  10k  [0603]  14.86,28.83 270 top
R7  10k  [0603]  17.78,60.15 0 top
R8  4.7k  [0603]  11.18,38.1 270 top
R9  100k  [0603]  19.6,36.83 0 top
R10  20k  [0603]  17.78,61.77 180 top
R11  1k  [0603]  11.05,41.96 270 top
R12  10k  [0603]  104.65,60.15 0 top
R13  20k  [0603]  104.65,61.77 180 top
R14  5.1k  [0603]  98.81,19.56 270 top
R15  5.1k  [0603]  107.95,19.56 270 top
R16  100k  [0603]  106.46,36.83 0 top
R17  1k  [0603]  97.92,41.96 270 top
R18  4.7k  [0603]  98.04,38.1 270 top
R19  1k  [0603]  97.92,45.59 270 top
R20  2.0k  [0603]  107.7,82.93 180 top
R21  10k  [0603]  100.84,82.93 0 top
R22  10k  [0603]  101.73,28.83 270 top
R23  10k  [0603]  17.78,138.13 0 top
R24  20k  [0603]  17.78,139.75 180 top
R25  5.1k  [0603]  11.94,97.54 270 top
R26  5.1k  [0603]  21.08,97.54 270 top
R27  100k  [0603]  19.6,114.81 0 top
R28  1k  [0603]  11.05,119.94 270 top
R29  4.7k  [0603]  11.18,116.08 270 top
R30  1k  [0603]  11.05,123.57 270 top
R31  2.0k  [0603]  20.83,160.91 180 top
R32  10k  [0603]  13.97,160.91 0 top
R33  10k  [0603]  14.86,106.81 270 top
R34  10k  [0603]  104.65,138.13 0 top
R35  20k  [0603]  104.65,139.75 180 top
R36  5.1k  [0603]  98.81,97.54 270 top
R37  5.1k  [0603]  107.95,97.54 270 top
R38  100k  [0603]  106.46,114.81 0 top
R39  1k  [0603]  97.92,119.94 270 top
R40  4.7k  [0603]  98.04,116.08 270 top
R41  1k  [0603]  97.92,123.57 270 top
R42  2.0k  [0603]  107.7,160.91 180 top
R43  10k  [0603]  100.84,160.91 0 top
R44  10k  [0603]  101.73,106.81 270 top
R45  10k  [0603]  17.78,216.1 0 top
R46  20k  [0603]  17.78,217.73 180 top
R47  5.1k  [0603]  11.94,175.51 270 top
R48  5.1k  [0603]  21.08,175.51 270 top
R49  100k  [0603]  19.6,192.79 0 top
R50  1k  [0603]  11.05,197.92 270 top
R51  4.7k  [0603]  11.18,194.06 270 top
R52  1k  [0603]  11.05,201.55 270 top
R53  2.0k  [0603]  20.83,238.89 180 top
R54  10k  [0603]  13.97,238.89 0 top
R55  10k  [0603]  14.86,184.78 270 top
R56  10k  [0603]  104.65,216.1 0 top
R57  20k  [0603]  104.65,217.73 180 top
R58  5.1k  [0603]  98.81,175.51 270 top
R59  5.1k  [0603]  107.95,175.51 270 top
R60  100k  [0603]  106.46,192.79 0 top
R61  1k  [0603]  97.92,197.92 270 top
R62  4.7k  [0603]  98.04,194.06 270 top
R63  1k  [0603]  97.92,201.55 270 top
R64  2.0k  [0603]  107.7,238.89 180 top
R65  10k  [0603]  100.84,238.89 0 top
R66  10k  [0603]  101.73,184.78 270 top
S1  Reset  [TACTILE_SWITCH_SMD_5.2MM]  11.05,60.58 180 top
S2  BOOT  [TACTILE_SWITCH_SMD_5.2MM]  11.05,53.85 180 top
S3  DIP-02-SMD-50MIL  [DIPSWITCH-02-50MIL]  17.4,79.25 180 top
S4  Reset  [TACTILE_SWITCH_SMD_5.2MM]  97.92,60.58 180 top
S5  BOOT  [TACTILE_SWITCH_SMD_5.2MM]  97.92,53.85 180 top
S6  DIP-02-SMD-50MIL  [DIPSWITCH-02-50MIL]  104.27,79.25 180 top
S7  Reset  [TACTILE_SWITCH_SMD_5.2MM]  11.05,138.56 180 top
S8  BOOT  [TACTILE_SWITCH_SMD_5.2MM]  11.05,131.83 180 top
S9  DIP-02-SMD-50MIL  [DIPSWITCH-02-50MIL]  17.4,157.23 180 top
S10  Reset  [TACTILE_SWITCH_SMD_5.2MM]  97.92,138.56 180 top
S11  BOOT  [TACTILE_SWITCH_SMD_5.2MM]  97.92,131.83 180 top
S12  DIP-02-SMD-50MIL  [DIPSWITCH-02-50MIL]  104.27,157.23 180 top
S13  Reset  [TACTILE_SWITCH_SMD_5.2MM]  11.05,216.53 180 top
S14  BOOT  [TACTILE_SWITCH_SMD_5.2MM]  11.05,209.8 180 top
S15  DIP-02-SMD-50MIL  [DIPSWITCH-02-50MIL]  17.4,235.2 180 top
S16  Reset  [TACTILE_SWITCH_SMD_5.2MM]  97.92,216.53 180 top
S17  BOOT  [TACTILE_SWITCH_SMD_5.2MM]  97.92,209.8 180 top
S18  DIP-02-SMD-50MIL  [DIPSWITCH-02-50MIL]  104.27,235.2 180 top
TP1  TEST-POINT3X5  [PAD.03X.05]  9.4,66.55 0 bottom
TP2  TEST-POINT3X5  [PAD.03X.05]  13.08,66.55 0 bottom
TP3  TEST-POINT3X5  [PAD.03X.05]  23.37,76.71 0 bottom
TP4  TEST-POINT3X5  [PAD.03X.05]  10.54,23.75 0 bottom
TP5  TEST-POINT3X5  [PAD.03X.05]  99.95,66.55 0 bottom
TP6  TEST-POINT3X5  [PAD.03X.05]  110.24,76.71 0 bottom
TP7  TEST-POINT3X5  [PAD.03X.05]  97.41,23.75 0 bottom
TP8  TEST-POINT3X5  [PAD.03X.05]  96.27,66.55 0 bottom
TP9  TEST-POINT3X5  [PAD.03X.05]  13.08,144.53 0 bottom
TP10  TEST-POINT3X5  [PAD.03X.05]  23.37,154.69 0 bottom
TP11  TEST-POINT3X5  [PAD.03X.05]  10.54,101.73 0 bottom
TP12  TEST-POINT3X5  [PAD.03X.05]  9.4,144.53 0 bottom
TP13  TEST-POINT3X5  [PAD.03X.05]  99.95,144.53 0 bottom
TP14  TEST-POINT3X5  [PAD.03X.05]  110.24,154.69 0 bottom
TP15  TEST-POINT3X5  [PAD.03X.05]  97.41,101.73 0 bottom
TP16  TEST-POINT3X5  [PAD.03X.05]  96.27,144.53 0 bottom
TP17  TEST-POINT3X5  [PAD.03X.05]  13.08,222.5 0 bottom
TP18  TEST-POINT3X5  [PAD.03X.05]  23.37,232.66 0 bottom
TP19  TEST-POINT3X5  [PAD.03X.05]  10.54,179.71 0 bottom
TP20  TEST-POINT3X5  [PAD.03X.05]  9.4,222.5 0 bottom
TP21  TEST-POINT3X5  [PAD.03X.05]  99.95,222.5 0 bottom
TP22  TEST-POINT3X5  [PAD.03X.05]  110.24,232.66 0 bottom
TP23  TEST-POINT3X5  [PAD.03X.05]  97.41,179.71 0 bottom
TP24  TEST-POINT3X5  [PAD.03X.05]  96.27,222.5 0 bottom
U1  AP7361C-33  [UDFN-8]  106.58,40.61 180 top
U2  MCP73831  [SOT23-5]  17.83,69.24 90 top
U3  MCP73831  [SOT23-5]  104.7,69.24 90 top
U4  AP7361C-33  [UDFN-8]  19.71,118.59 180 top
U5  AP7361C-33  [UDFN-8]  19.71,40.61 180 top
U6  MCP73831  [SOT23-5]  17.83,147.22 90 top
U7  AP7361C-33  [UDFN-8]  106.58,118.59 180 top
U8  MCP73831  [SOT23-5]  104.7,147.22 90 top
U9  AP7361C-33  [UDFN-8]  19.71,196.57 180 top
U10  MCP73831  [SOT23-5]  17.83,225.2 90 top
U11  AP7361C-33  [UDFN-8]  106.58,196.57 180 top
U12  MCP73831  [SOT23-5]  104.7,225.2 90 top
U$1  [3V332530]  12.45,41.91 270 top
U$2  [VIN32529]  12.57,38.1 270 top
U$3  [CHG32528]  12.57,45.59 270 top
U$4  [FUNCTION_ZERO517]  69.47,82.04 0 top
U$5  [PROCESSOR522]  34.42,65.91 0 top
U$6  [#3V3_LED#17]  12.45,42.44 0 bottom
U$7  [#VIN_LED#16]  12.24,38.13 0 bottom
U$8  [#PTC#18]  15.39,23.44 0 bottom
U$9  [BOOT32541]  15.6,53.57 270 top
U$10  [RESET32540]  15.49,60.45 270 top
U$11  [#3V3_EN#18]  18.9,40.36 0 bottom
U$12  [MICROMOD_MI_LOGO_1]  24.89,72.64 0 top
U$13  [0525]  69.34,66.04 0 top
U$14  [MICROMOD_LOGO_1]  66.67,34.16 0 bottom
U$15  [MAIN523]  73.15,27.56 0 bottom
U$16  [BOARD524]  61.21,27.43 0 bottom
U$17  [100MA6]  14.35,79.12 270 top
U$18  [500MA101]  20.45,79.12 270 top
U$19  [MAIN_BOARD5523]  38.73,72.14 0 top
U$20  [QWIIC_3MM]  9.4,30.99 0 top
U$21  [STANDOFF501]  10.41,29.84 0 top
U$22  [SFE_LOGO_FLAME_.2]  9.61,24.21 0 top
U$23  [#MEAS#40313513]  21.55,45.08 270 top
U$24  [3V332530]  99.31,41.91 270 top
U$25  [VIN32529]  99.44,38.1 270 top
U$26  [CHG32528]  99.44,45.59 270 top
U$27  [FUNCTION_ZERO517]  156.34,82.04 0 top
U$28  [PROCESSOR522]  121.29,65.91 0 top
U$29  [#3V3_LED#17]  99.31,42.44 0 bottom
U$30  [#VIN_LED#16]  99.11,38.13 0 bottom
U$31  [#PTC#18]  102.26,23.44 0 bottom
U$32  [BOOT32541]  102.46,53.57 270 top
U$33  [RESET32540]  102.36,60.45 270 top
U$34  [#3V3_EN#18]  105.77,40.36 0 bottom
U$35  [MICROMOD_MI_LOGO_1]  111.76,72.64 0 top
U$36  [0525]  156.21,66.04 0 top
U$37  [MAIN523]  160.02,27.56 0 bottom
U$38  [BOARD524]  148.08,27.43 0 bottom
U$39  [100MA6]  101.22,79.12 270 top
U$40  [500MA101]  107.31,79.12 270 top
U$41  [MAIN_BOARD5523]  125.6,72.14 0 top
U$42  [MICROMOD_LOGO_1]  153.54,34.16 0 bottom
U$43  [QWIIC_3MM]  96.27,30.99 0 top
U$44  [STANDOFF501]  97.28,29.84 0 top
U$45  [SFE_LOGO_FLAME_.2]  96.48,24.21 0 top
U$46  [#MEAS#40313513]  108.42,45.08 270 top
U$47  [3V332530]  12.45,119.89 270 top
U$48  [VIN32529]  12.57,116.08 270 top
U$49  [CHG32528]  12.57,123.57 270 top
U$50  [FUNCTION_ZERO517]  69.47,160.02 0 top
U$51  [PROCESSOR522]  34.42,143.89 0 top
U$52  [#3V3_LED#17]  12.45,120.42 0 bottom
U$53  [#VIN_LED#16]  12.24,116.1 0 bottom
U$54  [#PTC#18]  15.39,101.42 0 bottom
U$55  [BOOT32541]  15.6,131.55 270 top
U$56  [RESET32540]  15.49,138.43 270 top
U$57  [#3V3_EN#18]  18.9,118.34 0 bottom
U$58  [MICROMOD_MI_LOGO_1]  24.89,150.62 0 top
U$59  [0525]  69.34,144.02 0 top
U$60  [MAIN523]  73.15,105.54 0 bottom
U$61  [BOARD524]  61.21,105.41 0 bottom
U$62  [100MA6]  14.35,157.1 270 top
U$63  [500MA101]  20.45,157.1 270 top
U$64  [MAIN_BOARD5523]  38.73,150.11 0 top
U$65  [MICROMOD_LOGO_1]  66.67,112.14 0 bottom
U$66  [QWIIC_3MM]  9.4,108.97 0 top
U$67  [STANDOFF501]  10.41,107.82 0 top
U$68  [SFE_LOGO_FLAME_.2]  9.61,102.19 0 top
U$69  [#MEAS#40313513]  21.55,123.06 270 top
U$70  [3V332530]  99.31,119.89 270 top
U$71  [VIN32529]  99.44,116.08 270 top
U$72  [CHG32528]  99.44,123.57 270 top
U$73  [FUNCTION_ZERO517]  156.34,160.02 0 top
U$74  [PROCESSOR522]  121.29,143.89 0 top
U$75  [#3V3_LED#17]  99.31,120.42 0 bottom
U$76  [#VIN_LED#16]  99.11,116.1 0 bottom
U$77  [#PTC#18]  102.26,101.42 0 bottom
U$78  [BOOT32541]  102.46,131.55 270 top
U$79  [RESET32540]  102.36,138.43 270 top
U$80  [#3V3_EN#18]  105.77,118.34 0 bottom
U$81  [MICROMOD_MI_LOGO_1]  111.76,150.62 0 top
U$82  [0525]  156.21,144.02 0 top
U$83  [MAIN523]  160.02,105.54 0 bottom
U$84  [BOARD524]  148.08,105.41 0 bottom
U$85  [100MA6]  101.22,157.1 270 top
U$86  [500MA101]  107.31,157.1 270 top
U$87  [MAIN_BOARD5523]  125.6,150.11 0 top
U$88  [MICROMOD_LOGO_1]  153.54,112.14 0 bottom
U$89  [QWIIC_3MM]  96.27,108.97 0 top
U$90  [STANDOFF501]  97.28,107.82 0 top
U$91  [SFE_LOGO_FLAME_.2]  96.48,102.19 0 top
U$92  [#MEAS#40313513]  108.42,123.06 270 top
U$93  [3V332530]  12.45,197.87 270 top
U$94  [VIN32529]  12.57,194.06 270 top
U$95  [CHG32528]  12.57,201.55 270 top
U$96  [FUNCTION_ZERO517]  69.47,238 0 top
U$97  [PROCESSOR522]  34.42,221.87 0 top
U$98  [#3V3_LED#17]  12.45,198.4 0 bottom
U$99  [#VIN_LED#16]  12.24,194.08 0 bottom
U$100  [#PTC#18]  15.39,179.4 0 bottom
U$101  [BOOT32541]  15.6,209.52 270 top
U$102  [RESET32540]  15.49,216.41 270 top
U$103  [#3V3_EN#18]  18.9,196.32 0 bottom
U$104  [MICROMOD_MI_LOGO_1]  24.89,228.6 0 top
U$105  [0525]  69.34,222 0 top
U$106  [MAIN523]  73.15,183.52 0 bottom
U$107  [BOARD524]  61.21,183.39 0 bottom
U$108  [100MA6]  14.35,235.08 270 top
U$109  [500MA101]  20.45,235.08 270 top
U$110  [MAIN_BOARD5523]  38.73,228.09 0 top
U$111  [MICROMOD_LOGO_1]  66.67,190.12 0 bottom
U$112  [QWIIC_3MM]  9.4,186.94 0 top
U$113  [STANDOFF501]  10.41,185.8 0 top
U$114  [SFE_LOGO_FLAME_.2]  9.61,180.16 0 top
U$115  [#MEAS#40313513]  21.55,201.03 270 top
U$116  [3V332530]  99.31,197.87 270 top
U$117  [VIN32529]  99.44,194.06 270 top
U$118  [CHG32528]  99.44,201.55 270 top
U$119  [FUNCTION_ZERO517]  156.34,238 0 top
U$120  [PROCESSOR522]  121.29,221.87 0 top
U$121  [#3V3_LED#17]  99.31,198.4 0 bottom
U$122  [#VIN_LED#16]  99.11,194.08 0 bottom
U$123  [#PTC#18]  102.26,179.4 0 bottom
U$124  [BOOT32541]  102.46,209.52 270 top
U$125  [RESET32540]  102.36,216.41 270 top
U$126  [#3V3_EN#18]  105.77,196.32 0 bottom
U$127  [MICROMOD_MI_LOGO_1]  111.76,228.6 0 top
U$128  [0525]  156.21,222 0 top
U$129  [MAIN523]  160.02,183.52 0 bottom
U$130  [BOARD524]  148.08,183.39 0 bottom
U$131  [100MA6]  101.22,235.08 270 top
U$132  [500MA101]  107.31,235.08 270 top
U$133  [MAIN_BOARD5523]  125.6,228.09 0 top
U$134  [MICROMOD_LOGO_1]  153.54,190.12 0 bottom
U$135  [QWIIC_3MM]  96.27,186.94 0 top
U$136  [STANDOFF501]  97.28,185.8 0 top
U$137  [SFE_LOGO_FLAME_.2]  96.48,180.16 0 top
U$138  [#MEAS#40313513]  108.42,201.03 270 top
VE  [SMT-JUMPER_2_NO_SILK]  15.62,40.28 270 bottom
VE1  [SMT-JUMPER_2_NO_SILK]  102.49,40.28 270 bottom
VE2  [SMT-JUMPER_2_NO_SILK]  15.62,118.26 270 bottom
VE3  [SMT-JUMPER_2_NO_SILK]  102.49,118.26 270 bottom
VE4  [SMT-JUMPER_2_NO_SILK]  15.62,196.24 270 bottom
VE5  [SMT-JUMPER_2_NO_SILK]  102.49,196.24 270 bottom

## Library data of the parts
3V3_LED 3V3_LED1-3V3_LED5 5V_LED 5V_LED1-5V_LED5 BYP BYP1-BYP5 MEAS MEAS1-MEAS5 VE VE1-VE5 = SparkFun-Jumpers
C1 C5 C7 C10 C12 C14 C19 C21 C23 C28 C30 C32 C37 C39 C41 C46 C48 C50 = SparkFun-Capacitors; PROD_ID: CAP-00810
C2 C6 C11 C15 C20 C24 C29 C33 C38 C42 C47 C51 = SparkFun-Capacitors; PROD_ID: CAP-07822
C3 C17 C26 C35 C44 C53 = SparkFun-Capacitors; PROD_ID: CAP-08280
C4 C18 C27 C36 C45 C54 = SparkFun-Capacitors; PROD_ID: CAP-14106
C8 C16 C25 C34 C43 C52 = SparkFun-Capacitors; PROD_ID: CAP-11330
C9 C13 C22 C31 C40 C49 = SparkFun-Capacitors; PROD_ID: CAP-00868
D1 D2 D11 D16 D21 D26 = SparkFun-DiscreteSemi; PROD_ID: DIO-11284
D3 D6 D8 D9 D12 D14 D17 D19 D22 D24 D27 D29 = SparkFun-LED; PROD_ID: DIO-00819
D4 D10 D15 D20 D25 D30 = SparkFun-LED; PROD_ID: DIO-09003
D5 D7 D13 D18 D23 D28 = SparkFun-DiscreteSemi; PROD_ID: DIO-14072
E$1-E$4 FD1-FD24 LOGO1-LOGO18 U$20 U$22 U$43 U$45 U$66 U$68 U$89 U$91 U$112 U$114 U$135 U$137 = SparkFun-Aesthetics
E$5 E$6 = SparkFun-Retired
F1-F6 = SparkFun-Fuses; PROD_ID: RES-14313
H1 H6 H7 H9 H10 H12 H14-H17 H19-H22 H24 H27-H30 H32 H35-H38 H40 H43-H46 H48 = SparkFun-Hardware
H2-H5 H8 H11 H13 H18 H23 H25 H26 H31 H33 H34 H39 H41 H42 H47 = SparkFun-Hardware; PROD_ID: HW-14899
J1 J11 J21 J30 J39 J48 = SparkFun-MicroMod; PROD_ID: CONN-14877
J2 J7 J19 J28 J37 J46 = SparkFun-Connectors; PROD_ID: CONN-14483
J3 J17 J26 J35 J44 J53 = SparkFun-Connectors; PROD_ID: CONN-14122
J4 J9 J20 J29 J38 J47 = SparkFun-Connectors; PROD_ID: CONN-13694
J5 J12-J14 J22 J23 J31 J32 J40 J41 J49 J50 TP1-TP24 = SparkFun-Connectors
J6 J15 J24 J33 J42 J51 = SparkFun-MicroMod-Function; PROD_ID: CONN-14877
J8 J18 J27 J36 J45 J54 = SparkFun-Connectors; PROD_ID: CONN-11443; SF_ID: PRT-08612
J10 J16 J25 J34 J43 J52 = SparkFun-Connectors; PROD_ID: CONN-16110
Q1-Q6 = SparkFun-DiscreteSemi; PROD_ID: TRANS-11308
R1 R2 R14 R15 R25 R26 R36 R37 R47 R48 R58 R59 = SparkFun-Resistors; PROD_ID: RES-12083
R3 R20 R31 R42 R53 R64 = SparkFun-Resistors; PROD_ID: RES-08296
R4 R6 R7 R12 R21-R23 R32-R34 R43-R45 R54-R56 R65 R66 = SparkFun-Resistors; PROD_ID: RES-00824
R5 R11 R17 R19 R28 R30 R39 R41 R50 R52 R61 R63 = SparkFun-Resistors; PROD_ID: RES-07856
R8 R18 R29 R40 R51 R62 = SparkFun-Resistors; PROD_ID: RES-07857
R9 R16 R27 R38 R49 R60 = SparkFun-Resistors; PROD_ID: RES-07828
R10 R13 R24 R35 R46 R57 = SparkFun-Resistors; PROD_ID: RES-09383
S1 S2 S4 S5 S7 S8 S10 S11 S13 S14 S16 S17 = SparkFun-Switches; PROD_ID: SWCH-14139
S3 S6 S9 S12 S15 S18 = SparkFun-Switches; PROD_ID: SWCH-13215
U1 U4 U5 U7 U9 U11 = SparkFun-IC-Power; PROD_ID: VREG-14094
U2 U3 U6 U8 U10 U12 = SparkFun-IC-Power; PROD_ID: IC-09995
U$1-U$11 U$13 U$15-U$19 U$21 U$23-U$34 U$36-U$41 U$44 U$46-U$57 U$59-U$64 U$67 U$69-U$80 U$82-U$87 U$90 U$92-U$103 U$105-U$110 U$113 U$115-U$126 U$128-U$133 U$136 U$138 = top
U$12 U$14 U$35 U$42 U$58 U$65 U$81 U$88 U$104 U$111 U$127 U$134 = SparkFun-MicroMod

## Nets
3.3V [POWER]: C9.1 C10.1 C11.1 C12.1 J1.2 J1.74 J2.2 J4.2 J5.1 J6.73 J10.4 MEAS.2 MEAS.4 R11.2 TP2.1
3.3V1 [POWER]: C1.1 C13.1 C14.1 C15.1 J7.2 J9.2 J11.2 J11.74 J12.1 J15.73 J16.4 MEAS1.2 MEAS1.4 R17.2 TP5.1
3.3V2 [POWER]: C19.1 C22.1 C23.1 C24.1 J19.2 J20.2 J21.2 J21.74 J22.1 J24.73 J25.4 MEAS2.2 MEAS2.4 R28.2 TP9.1
3.3V3 [POWER]: C28.1 C31.1 C32.1 C33.1 J28.2 J29.2 J30.2 J30.74 J31.1 J33.73 J34.4 MEAS3.2 MEAS3.4 R39.2 TP13.1
3.3V4 [POWER]: C37.1 C40.1 C41.1 C42.1 J37.2 J38.2 J39.2 J39.74 J40.1 J42.73 J43.4 MEAS4.2 MEAS4.4 R50.2 TP17.1
3.3V5 [POWER]: C46.1 C49.1 C50.1 C51.1 J46.2 J47.2 J48.2 J48.74 J49.1 J51.73 J52.4 MEAS5.2 MEAS5.4 R61.2 TP21.1
3.3V_EN: J1.4 VE.1
3.3V_EN1: J11.4 VE1.1
3.3V_EN2: J21.4 VE2.1
3.3V_EN3: J30.4 VE3.1
3.3V_EN4: J39.4 VE4.1
3.3V_EN5: J48.4 VE5.1
3.3V_EN_VE: D1.C R9.1 U5.5 VE.2
3.3V_EN_VE1: D2.C R16.1 U1.5 VE1.2
3.3V_EN_VE2: D11.C R27.1 U4.5 VE2.2
3.3V_EN_VE3: D16.C R38.1 U7.5 VE3.2
3.3V_EN_VE4: D21.C R49.1 U9.5 VE4.2
3.3V_EN_VE5: D26.C R60.1 U11.5 VE5.2
!BOOT!: J1.11 S2.3 S2.4
!BOOT!1: J11.11 S5.3 S5.4
!BOOT!2: J21.11 S8.3 S8.4
!BOOT!3: J30.11 S11.3 S11.4
!BOOT!4: J39.11 S14.3 S14.4
!BOOT!5: J48.11 S17.3 S17.4
!CS0!-PROCESSOR: J1.55 J6.49
!CS0!-PROCESSOR1: J11.55 J15.49
!CS0!-PROCESSOR2: J21.55 J24.49
!CS0!-PROCESSOR3: J30.55 J33.49
!CS0!-PROCESSOR4: J39.55 J42.49
!CS0!-PROCESSOR5: J48.55 J51.49
!RESET!: J1.6 J5.10 J13.1 S1.3 S1.4
!RESET!1: J11.6 J12.10 J14.1 S4.3 S4.4
!RESET!2: J21.6 J22.10 J23.1 S7.3 S7.4
!RESET!3: J30.6 J31.10 J32.1 S10.3 S10.4
!RESET!4: J39.6 J40.10 J41.1 S13.3 S13.4
!RESET!5: J48.6 J49.10 J50.1 S16.3 S16.4
A0-PROCESSOR: J1.34 J6.38
A0-PROCESSOR1: J11.34 J15.38
A0-PROCESSOR2: J21.34 J24.38
A0-PROCESSOR3: J30.34 J33.38
A0-PROCESSOR4: J39.34 J42.38
A0-PROCESSOR5: J48.34 J51.38
CTS1-PROCESSOR: J1.15 J6.16
CTS1-PROCESSOR1: J11.15 J15.16
CTS1-PROCESSOR2: J21.15 J24.16
CTS1-PROCESSOR3: J30.15 J33.16
CTS1-PROCESSOR4: J39.15 J42.16
CTS1-PROCESSOR5: J48.15 J51.16
D0-PROCESSOR: J1.10 J6.47
D0-PROCESSOR1: J11.10 J15.47
D0-PROCESSOR2: J21.10 J24.47
D0-PROCESSOR3: J30.10 J33.47
D0-PROCESSOR4: J39.10 J42.47
D0-PROCESSOR5: J48.10 J51.47
D1-PROCESSOR/SD_CARD_!CS!: J1.18 J10.2
D1-PROCESSOR/SD_CARD_!CS!1: J11.18 J16.2
D1-PROCESSOR/SD_CARD_!CS!2: J21.18 J25.2
D1-PROCESSOR/SD_CARD_!CS!3: J30.18 J34.2
D1-PROCESSOR/SD_CARD_!CS!4: J39.18 J43.2
D1-PROCESSOR/SD_CARD_!CS!5: J48.18 J52.2
D+ [Diff pairs]: J1.3 J3.A6 J3.B6
D+1 [Diff pairs]: J11.3 J17.A6 J17.B6
D+2 [Diff pairs]: J21.3 J26.A6 J26.B6
D+3 [Diff pairs]: J30.3 J35.A6 J35.B6
D+4 [Diff pairs]: J39.3 J44.A6 J44.B6
D+5 [Diff pairs]: J48.3 J53.A6 J53.B6
D- [Diff pairs]: J1.5 J3.A7 J3.B7
D-1 [Diff pairs]: J11.5 J17.A7 J17.B7
D-2 [Diff pairs]: J21.5 J26.A7 J26.B7
D-3 [Diff pairs]: J30.5 J35.A7 J35.B7
D-4 [Diff pairs]: J39.5 J44.A7 J44.B7
D-5 [Diff pairs]: J48.5 J53.A7 J53.B7
G0-PROCESSOR: J1.40 J6.53
G0-PROCESSOR1: J11.40 J15.53
G0-PROCESSOR2: J21.40 J24.53
G0-PROCESSOR3: J30.40 J33.53
G0-PROCESSOR4: J39.40 J42.53
G0-PROCESSOR5: J48.40 J51.53
G1-PROCESSOR: J1.42 J6.55
G1-PROCESSOR1: J11.42 J15.55
G1-PROCESSOR2: J21.42 J24.55
G1-PROCESSOR3: J30.42 J33.55
G1-PROCESSOR4: J39.42 J42.55
G1-PROCESSOR5: J48.42 J51.55
G2-PROCESSOR: J1.44 J6.57
G2-PROCESSOR1: J11.44 J15.57
G2-PROCESSOR2: J21.44 J24.57
G2-PROCESSOR3: J30.44 J33.57
G2-PROCESSOR4: J39.44 J42.57
G2-PROCESSOR5: J48.44 J51.57
G3-PROCESSOR: J1.46 J6.59
G3-PROCESSOR1: J11.46 J15.59
G3-PROCESSOR2: J21.46 J24.59
G3-PROCESSOR3: J30.46 J33.59
G3-PROCESSOR4: J39.46 J42.59
G3-PROCESSOR5: J48.46 J51.59
G4-PROCESSOR: J1.48 J6.61
G4-PROCESSOR1: J11.48 J15.61
G4-PROCESSOR2: J21.48 J24.61
G4-PROCESSOR3: J30.48 J33.61
G4-PROCESSOR4: J39.48 J42.61
G4-PROCESSOR5: J48.48 J51.61
GND: 3V3_LED.1 5V_LED.1 C2.2 C3.2 C4.2 C5.2 C8.2 C9.2 C10.2 C11.2 C12.2 D1.A H3.1 H4.1 H8.1 J1.1 J1.7 J1.33 J1.36 J1.39 J1.45 J1.75 J2.1 J3.GND J3.GND2 J4.1 J5.3 J5.5 J5.9 J6.1 J6.32 J6.33 J6.34 J6.36 J6.39 J6.45 J6.75 J8.1 J10.6 J10.10 J10.11 J10.12 J10.13 R1.1 R2.1 R3.1 R4.1 R6.1 R7.1 S1.1 S1.2 S2.1 S2.2 U2.2 U5.4 U5.EP
GND1: 3V3_LED1.1 5V_LED1.1 C1.2 C6.2 C7.2 C13.2 C14.2 C15.2 C16.2 C17.2 C18.2 D2.A H2.1 H5.1 H11.1 J7.1 J9.1 J11.1 J11.7 J11.33 J11.36 J11.39 J11.45 J11.75 J12.3 J12.5 J12.9 J15.1 J15.32 J15.33 J15.34 J15.36 J15.39 J15.45 J15.75 J16.6 J16.10 J16.11 J16.12 J16.13 J17.GND J17.GND2 J18.1 R12.1 R14.1 R15.1 R20.1 R21.1 R22.1 S4.1 S4.2 S5.1 S5.2 U1.4 U1.EP U3.2
GND2: 3V3_LED2.1 5V_LED2.1 C19.2 C20.2 C21.2 C22.2 C23.2 C24.2 C25.2 C26.2 C27.2 D11.A H13.1 H18.1 H23.1 J19.1 J20.1 J21.1 J21.7 J21.33 J21.36 J21.39 J21.45 J21.75 J22.3 J22.5 J22.9 J24.1 J24.32 J24.33 J24.34 J24.36 J24.39 J24.45 J24.75 J25.6 J25.10 J25.11 J25.12 J25.13 J26.GND J26.GND2 J27.1 R23.1 R25.1 R26.1 R31.1 R32.1 R33.1 S7.1 S7.2 S8.1 S8.2 U4.4 U4.EP U6.2
GND3: 3V3_LED3.1 5V_LED3.1 C28.2 C29.2 C30.2 C31.2 C32.2 C33.2 C34.2 C35.2 C36.2 D16.A H25.1 H26.1 H31.1 J28.1 J29.1 J30.1 J30.7 J30.33 J30.36 J30.39 J30.45 J30.75 J31.3 J31.5 J31.9 J33.1 J33.32 J33.33 J33.34 J33.36 J33.39 J33.45 J33.75 J34.6 J34.10 J34.11 J34.12 J34.13 J35.GND J35.GND2 J36.1 R34.1 R36.1 R37.1 R42.1 R43.1 R44.1 S10.1 S10.2 S11.1 S11.2 U7.4 U7.EP U8.2
GND4: 3V3_LED4.1 5V_LED4.1 C37.2 C38.2 C39.2 C40.2 C41.2 C42.2 C43.2 C44.2 C45.2 D21.A H33.1 H34.1 H39.1 J37.1 J38.1 J39.1 J39.7 J39.33 J39.36 J39.39 J39.45 J39.75 J40.3 J40.5 J40.9 J42.1 J42.32 J42.33 J42.34 J42.36 J42.39 J42.45 J42.75 J43.6 J43.10 J43.11 J43.12 J43.13 J44.GND J44.GND2 J45.1 R45.1 R47.1 R48.1 R53.1 R54.1 R55.1 S13.1 S13.2 S14.1 S14.2 U9.4 U9.EP U10.2
GND5: 3V3_LED5.1 5V_LED5.1 C46.2 C47.2 C48.2 C49.2 C50.2 C51.2 C52.2 C53.2 C54.2 D26.A H41.1 H42.1 H47.1 J46.1 J47.1 J48.1 J48.7 J48.33 J48.36 J48.39 J48.45 J48.75 J49.3 J49.5 J49.9 J51.1 J51.32 J51.33 J51.34 J51.36 J51.39 J51.45 J51.75 J52.6 J52.10 J52.11 J52.12 J52.13 J53.GND J53.GND2 J54.1 R56.1 R58.1 R59.1 R64.1 R65.1 R66.1 S16.1 S16.2 S17.1 S17.2 U11.4 U11.EP U12.2
HOST_D+ [Diff pairs]: J1.35 J6.35
HOST_D+1 [Diff pairs]: J11.35 J15.35
HOST_D+2 [Diff pairs]: J21.35 J24.35
HOST_D+3 [Diff pairs]: J30.35 J33.35
HOST_D+4 [Diff pairs]: J39.35 J42.35
HOST_D+5 [Diff pairs]: J48.35 J51.35
HOST_D- [Diff pairs]: J1.37 J6.37
HOST_D-1 [Diff pairs]: J11.37 J15.37
HOST_D-2 [Diff pairs]: J21.37 J24.37
HOST_D-3 [Diff pairs]: J30.37 J33.37
HOST_D-4 [Diff pairs]: J39.37 J42.37
HOST_D-5 [Diff pairs]: J48.37 J51.37
I2C_!INT!: J1.16 J6.23
I2C_!INT!1: J11.16 J15.23
I2C_!INT!2: J21.16 J24.23
I2C_!INT!3: J30.16 J33.23
I2C_!INT!4: J39.16 J42.23
I2C_!INT!5: J48.16 J51.23
I2C_SCL: J1.14 J2.4 J4.4 J6.21
I2C_SCL1: J7.4 J9.4 J11.14 J15.21
I2C_SCL2: J19.4 J20.4 J21.14 J24.21
I2C_SCL3: J28.4 J29.4 J30.14 J33.21
I2C_SCL4: J37.4 J38.4 J39.14 J42.21
I2C_SCL5: J46.4 J47.4 J48.14 J51.21
I2C_SDA: J1.12 J2.3 J4.3 J6.19
I2C_SDA1: J7.3 J9.3 J11.12 J15.19
I2C_SDA2: J19.3 J20.3 J21.12 J24.19
I2C_SDA3: J28.3 J29.3 J30.12 J33.19
I2C_SDA4: J37.3 J38.3 J39.12 J42.19
I2C_SDA5: J46.3 J47.3 J48.12 J51.19
N$1: J17.B5 R15.2
N$2: MEAS.1 MEAS.3 U5.1
N$3: D3.A R11.1
N$4: J3.B5 R2.2
N$5: J3.A5 R1.2
N$6 [POWER]: BYP.1 F2.1 J3.VBUS1 J3.VBUS2
N$7: R3.2 S3.1
N$8: S3.3 S3.4 U2.5
N$9: 5V_LED.2 D8.C
N$10: 3V3_LED.2 D3.C
N$11: R4.2 S3.2
N$12: D8.A R8.1
N$13: J17.A5 R14.2
N$14: D4.C R5.2
N$15: R5.1 U2.1
N$16: MEAS1.1 MEAS1.3 U1.1
N$17: D6.A R17.1
N$18 [POWER]: BYP1.1 F1.1 J17.VBUS1 J17.VBUS2
N$19: D9.A R18.1
N$20: 5V_LED1.2 D9.C
N$21: 3V3_LED1.2 D6.C
N$22: S6.3 S6.4 U3.5
N$23: D10.C R19.2
N$24: R19.1 U3.1
N$25: R20.2 S6.1
N$26: R21.2 S6.2
N$27: J26.B5 R26.2
N$28: J26.A5 R25.2
N$29: MEAS2.1 MEAS2.3 U4.1
N$30: D12.A R28.1
N$31 [POWER]: BYP2.1 F3.1 J26.VBUS1 J26.VBUS2
N$32: D14.A R29.1
N$33: 5V_LED2.2 D14.C
N$34: 3V3_LED2.2 D12.C
N$35: S9.3 S9.4 U6.5
N$36: D15.C R30.2
N$37: R30.1 U6.1
N$38: R31.2 S9.1
N$39: R32.2 S9.2
N$40: J35.B5 R37.2
N$41: J35.A5 R36.2
N$42: MEAS3.1 MEAS3.3 U7.1
N$43: D17.A R39.1
N$44 [POWER]: BYP3.1 F4.1 J35.VBUS1 J35.VBUS2
N$45: D19.A R40.1
N$46: 5V_LED3.2 D19.C
N$47: 3V3_LED3.2 D17.C
N$48: S12.3 S12.4 U8.5
N$49: D20.C R41.2
N$50: R41.1 U8.1
N$51: R42.2 S12.1
N$52: R43.2 S12.2
N$53: J44.B5 R48.2
N$54: J44.A5 R47.2
N$55: MEAS4.1 MEAS4.3 U9.1
N$56: D22.A R50.1
N$57 [POWER]: BYP4.1 F5.1 J44.VBUS1 J44.VBUS2
N$58: D24.A R51.1
N$59: 5V_LED4.2 D24.C
N$60: 3V3_LED4.2 D22.C
N$61: S15.3 S15.4 U10.5
N$62: D25.C R52.2
N$63: R52.1 U10.1
N$64: R53.2 S15.1
N$65: R54.2 S15.2
N$66: J53.B5 R59.2
N$67: J53.A5 R58.2
N$68: MEAS5.1 MEAS5.3 U11.1
N$69: D27.A R61.1
N$70 [POWER]: BYP5.1 F6.1 J53.VBUS1 J53.VBUS2
N$71: D29.A R62.1
N$72: 5V_LED5.2 D29.C
N$73: 3V3_LED5.2 D27.C
N$74: S18.3 S18.4 U12.5
N$75: D30.C R63.2
N$76: R63.1 U12.1
N$77: R64.2 S18.1
N$78: R65.2 S18.2
PROCESSOR_CAN-RX: J1.41 J6.43
PROCESSOR_CAN-RX1: J11.41 J15.43
PROCESSOR_CAN-RX2: J21.41 J24.43
PROCESSOR_CAN-RX3: J30.41 J33.43
PROCESSOR_CAN-RX4: J39.41 J42.43
PROCESSOR_CAN-RX5: J48.41 J51.43
PROCESSOR_CAN-TX: J1.43 J6.41
PROCESSOR_CAN-TX1: J11.43 J15.41
PROCESSOR_CAN-TX2: J21.43 J24.41
PROCESSOR_CAN-TX3: J30.43 J33.41
PROCESSOR_CAN-TX4: J39.43 J42.41
PROCESSOR_CAN-TX5: J48.43 J51.41
PWM0-PROCESSOR: J1.32 J6.51
PWM0-PROCESSOR1: J11.32 J15.51
PWM0-PROCESSOR2: J21.32 J24.51
PWM0-PROCESSOR3: J30.32 J33.51
PWM0-PROCESSOR4: J39.32 J42.51
PWM0-PROCESSOR5: J48.32 J51.51
PWR_EN0: J1.38 J1.68 J6.71
PWR_EN1: J11.38 J11.68 J15.71
PWR_EN2: J21.38 J21.68 J24.71
PWR_EN3: J30.38 J30.68 J33.71
PWR_EN4: J39.38 J39.68 J42.71
PWR_EN5: J48.38 J48.68 J51.71
RTS1-PROCESSOR: J1.13 J6.18
RTS1-PROCESSOR1: J11.13 J15.18
RTS1-PROCESSOR2: J21.13 J24.18
RTS1-PROCESSOR3: J30.13 J33.18
RTS1-PROCESSOR4: J39.13 J42.18
RTS1-PROCESSOR5: J48.13 J51.18
RX1-PROCESSOR: J1.19 J6.13
RX1-PROCESSOR1: J11.19 J15.13
RX1-PROCESSOR2: J21.19 J24.13
RX1-PROCESSOR3: J30.19 J33.13
RX1-PROCESSOR4: J39.19 J42.13
RX1-PROCESSOR5: J48.19 J51.13
SPI_PROCESSOR_SCK: J1.57 J6.3 J10.5
SPI_PROCESSOR_SCK1: J11.57 J15.3 J16.5
SPI_PROCESSOR_SCK2: J21.57 J24.3 J25.5
SPI_PROCESSOR_SCK3: J30.57 J33.3 J34.5
SPI_PROCESSOR_SCK4: J39.57 J42.3 J43.5
SPI_PROCESSOR_SCK5: J48.57 J51.3 J52.5
SPI_PROCESSOR_SDI: J1.61 J6.7 J10.7
SPI_PROCESSOR_SDI1: J11.61 J15.7 J16.7
SPI_PROCESSOR_SDI2: J21.61 J24.7 J25.7
SPI_PROCESSOR_SDI3: J30.61 J33.7 J34.7
SPI_PROCESSOR_SDI4: J39.61 J42.7 J43.7
SPI_PROCESSOR_SDI5: J48.61 J51.7 J52.7
SPI_PROCESSOR_SDO: J1.59 J6.5 J10.3
SPI_PROCESSOR_SDO1: J11.59 J15.5 J16.3
SPI_PROCESSOR_SDO2: J21.59 J24.5 J25.3
SPI_PROCESSOR_SDO3: J30.59 J33.5 J34.3
SPI_PROCESSOR_SDO4: J39.59 J42.5 J43.3
SPI_PROCESSOR_SDO5: J48.59 J51.5 J52.3
SWDCK: J1.21 J5.4
SWDCK1: J11.21 J12.4
SWDCK2: J21.21 J22.4
SWDCK3: J30.21 J31.4
SWDCK4: J39.21 J40.4
SWDCK5: J48.21 J49.4
SWDIO: J1.23 J5.2 TP1.1
SWDIO1: J11.23 J12.2 TP8.1
SWDIO2: J21.23 J22.2 TP12.1
SWDIO3: J30.23 J31.2 TP16.1
SWDIO4: J39.23 J40.2 TP20.1
SWDIO5: J48.23 J49.2 TP24.1
TX1-PROCESSOR: J1.17 J6.15
TX1-PROCESSOR1: J11.17 J15.15
TX1-PROCESSOR2: J21.17 J24.15
TX1-PROCESSOR3: J30.17 J33.15
TX1-PROCESSOR4: J39.17 J42.15
TX1-PROCESSOR5: J48.17 J51.15
V_BATT [POWER]: C4.1 J8.2 Q1.3 TP3.1 U2.3
V_BATT1 [POWER]: C18.1 J18.2 Q2.3 TP6.1 U3.3
V_BATT2 [POWER]: C27.1 J27.2 Q3.3 TP10.1 U6.3
V_BATT3 [POWER]: C36.1 J36.2 Q4.3 TP14.1 U8.3
V_BATT4 [POWER]: C45.1 J45.2 Q5.3 TP18.1 U10.3
V_BATT5 [POWER]: C54.1 J54.2 Q6.3 TP22.1 U12.3
VCC: C2.1 C3.1 C5.1 C8.1 D4.A D5.C J6.72 J6.74 Q1.2 R9.2 U2.4 U5.8
VCC1: C6.1 C7.1 C16.1 C17.1 D7.C D10.A J15.72 J15.74 Q2.2 R16.2 U1.8 U3.4
VCC2: C20.1 C21.1 C25.1 C26.1 D13.C D15.A J24.72 J24.74 Q3.2 R27.2 U4.8 U6.4
VCC3: C29.1 C30.1 C34.1 C35.1 D18.C D20.A J33.72 J33.74 Q4.2 R38.2 U7.8 U8.4
VCC4: C38.1 C39.1 C43.1 C44.1 D23.C D25.A J42.72 J42.74 Q5.2 R49.2 U9.8 U10.4
VCC5: C47.1 C48.1 C52.1 C53.1 D28.C D30.A J51.72 J51.74 Q6.2 R60.2 U11.8 U12.4
VIN: BYP.2 D5.A F2.2 J1.9 Q1.1 R6.2 R8.2 R10.2 TP4.1
VIN1: BYP1.2 D7.A F1.2 J11.9 Q2.1 R13.2 R18.2 R22.2 TP7.1
VIN2: BYP2.2 D13.A F3.2 J21.9 Q3.1 R24.2 R29.2 R33.2 TP11.1
VIN3: BYP3.2 D18.A F4.2 J30.9 Q4.1 R35.2 R40.2 R44.2 TP15.1
VIN4: BYP4.2 D23.A F5.2 J39.9 Q5.1 R46.2 R51.2 R55.2 TP19.1
VIN5: BYP5.2 D28.A F6.2 J48.9 Q6.1 R57.2 R62.2 R66.2 TP23.1
VIN/1: J11.49 R12.2 R13.1
VIN/2: J21.49 R23.2 R24.1
VIN/3: J1.49 R7.2 R10.1
VIN/4: J30.49 R34.2 R35.1
VIN/5: J39.49 R45.2 R46.1
VIN/6: J48.49 R56.2 R57.1

## Tracks (layer width: path | path; a pad name or v marks a point on that pad's centre or on a via)
3.3V  (via drill 0.3, 0.35)  (7 unrouted)
  Top 0.203: J5.1 11.31,69.09 11.94,69.72 11.94,73.03 12.32,73.41 v14.22,73.41 | R11.2 13.43,41.11 16.74,44.42 MEAS.4
  Top 0.559: v55.88,79.25 29.62,79.25 23.7,73.33 v23.19,73.33 23.06,73.2 v23.06,54.36 | v44.96,40.39 44.48,39.91 J2.2 44.46,22.85 44.46,20.55 | v17.53,52.58 17.53,49.44 C11.1 | C12.1 31.21,28.01 J10.4 31.27,26.03 31.27,22.55 33.27,20.55 44.46,20.55 | J4.2 44.46,20.55
  Bottom 0.203: v23.19,73.33 23.11,73.41 v14.22,73.41 | TP2.1 11.51,66.55 10.6,67.45 J5.1
  Bottom 0.559: v44.96,40.39 44.96,53.16 v44.96,54.36 v26.42,54.36 v23.06,54.36 19.3,54.36 v17.53,52.58 | v55.88,79.25 76.71,79.25 77.67,78.28 v77.67,77.7
  pour Top (isolate 0.305, no thermals): 16.74,43.54 16.74,50.35 18.62,50.35 18.62,43.54
  pour Top (isolate 0.305, no thermals): 44.7,56.59 44.7,53.87 45.69,53.87 45.69,54.56 45.14,55.12 45.14,56.59
  pour Top (isolate 0.305, no thermals): 26.92,56.64 26.42,56.64 26.42,55.12 26.16,54.86 26.16,53.85 26.92,53.85
  pour Top (no thermals): 77.7,79.22 77.98,79.22 77.98,77.42 77.47,77.42 77.47,78.18 77.7,78.18
3.3V1  (via drill 0.3, 0.35)  (7 unrouted)
  Top 0.203: J12.1 98.18,69.09 98.81,69.72 98.81,73.03 99.19,73.41 v101.09,73.41 | R17.2 100.29,41.11 103.61,44.42 MEAS1.4
  Top 0.559: v142.75,79.25 116.48,79.25 110.57,73.33 v110.06,73.33 109.93,73.2 v109.93,54.36 | v131.83,40.39 131.35,39.91 J7.2 131.33,22.85 131.33,20.55 | v104.39,52.58 104.39,49.44 C15.1 | C1.1 118.08,28.01 J16.4 118.14,26.03 118.14,22.55 120.14,20.55 131.33,20.55 | J9.2 131.33,20.55